# Altium PCB sigjumper.PcbDoc (part 1 of 5)
Units mil, origin at the board's own origin, x right, y up, seen from the top; angles counter-clockwise.
Board outline 7874.02 x 2559.06 mil, 14 copper layers (TOP, P1(GND), S1(V), P2(GND), S2(H), P3(GND), S3(V12/V2V5), S4(VDDR), P4(GND), S5(V), P5(GND), S6(H), P6(GND), BOT), stack 115.1 mil thick; 22 components, 186 nets, 824 pads, 732 vias.
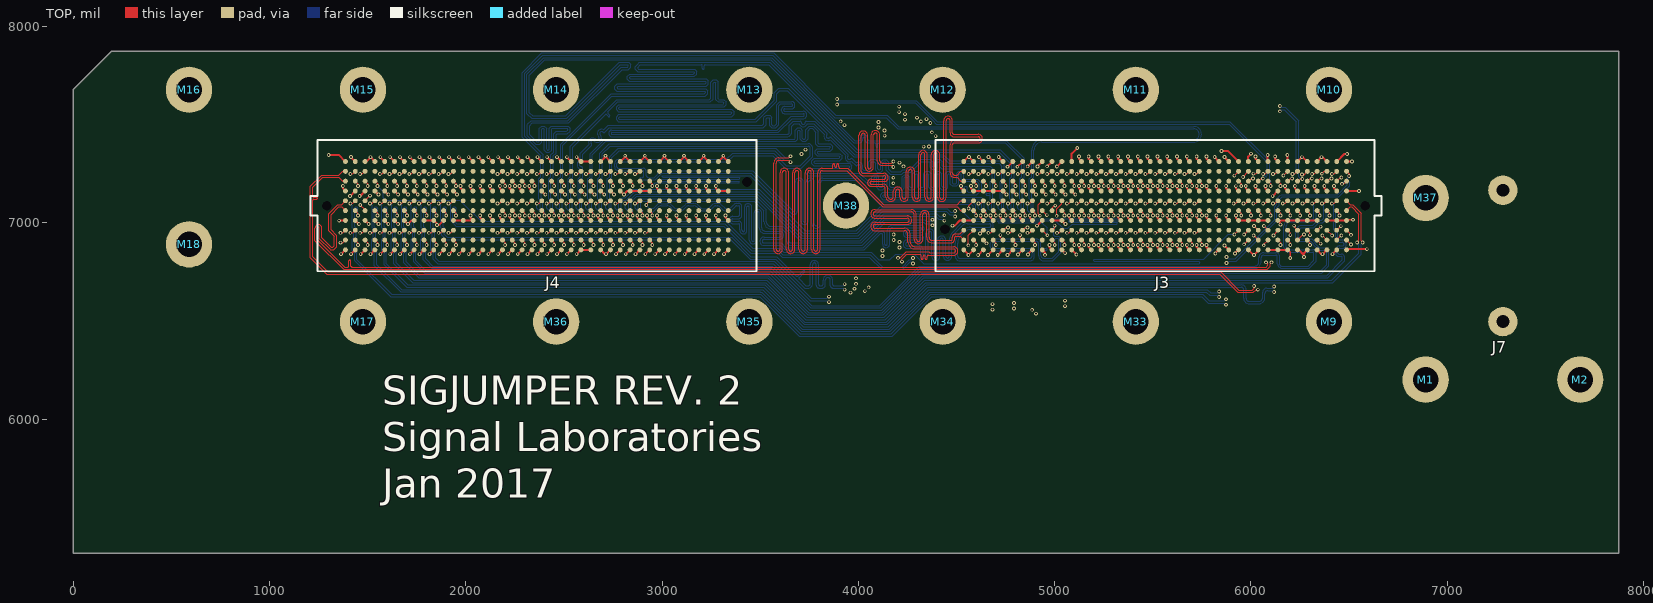
[diagram p0: TOP view]
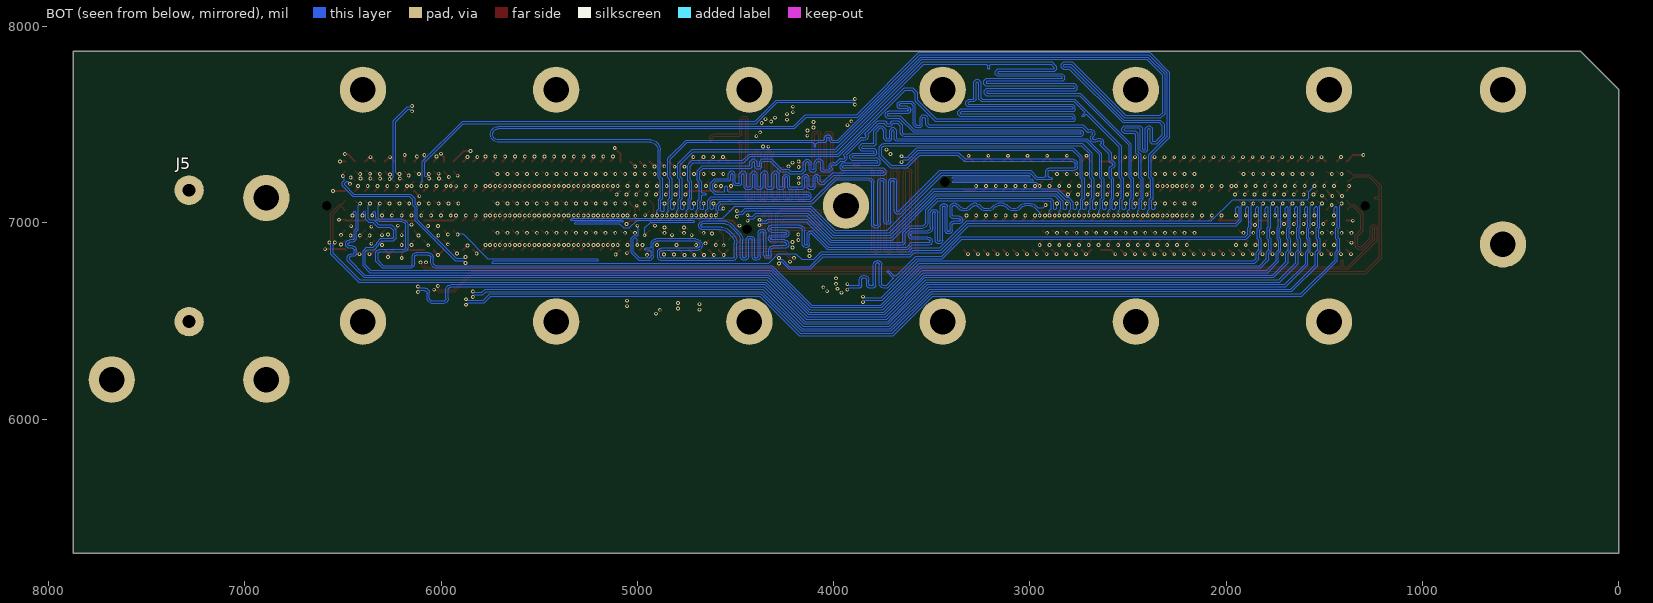
[diagram p1: BOT view, seen from below]
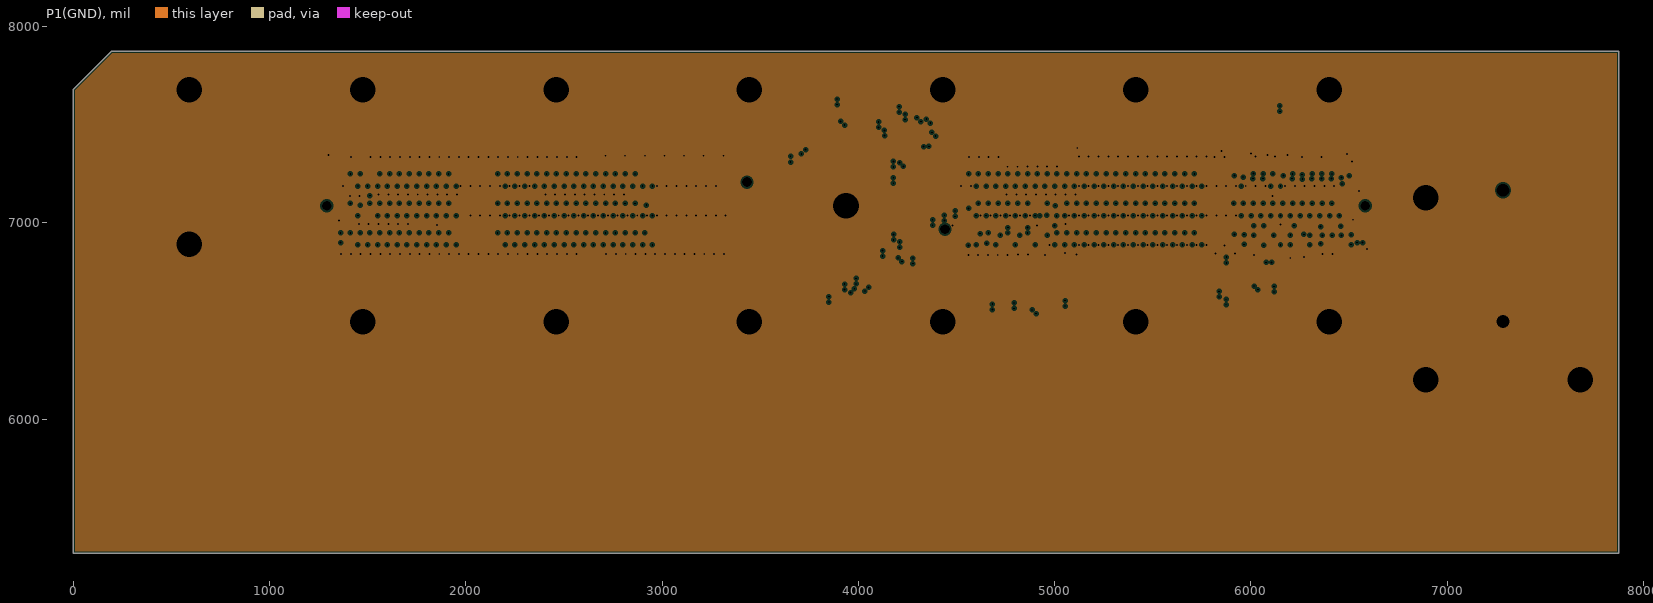
[diagram p2: P1(GND), clearances drawn from the general rule]
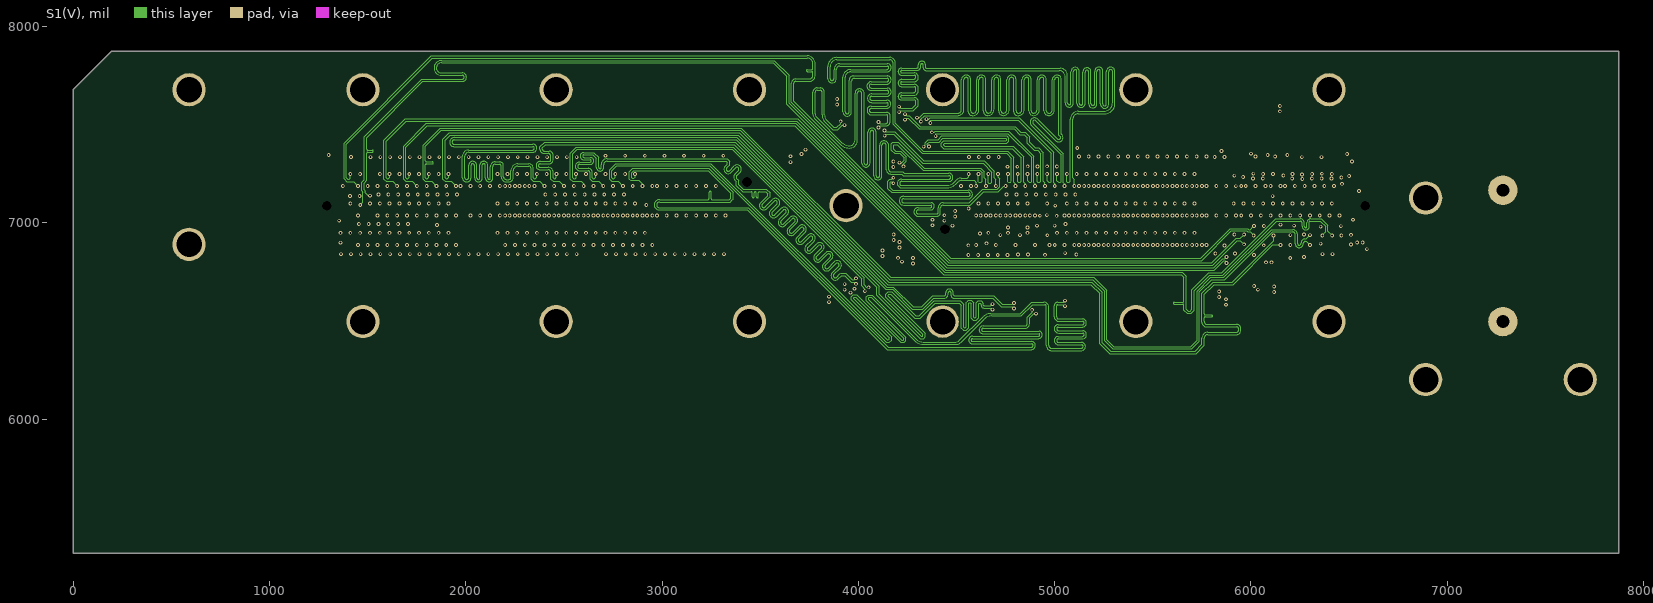
[diagram p3: S1(V)]
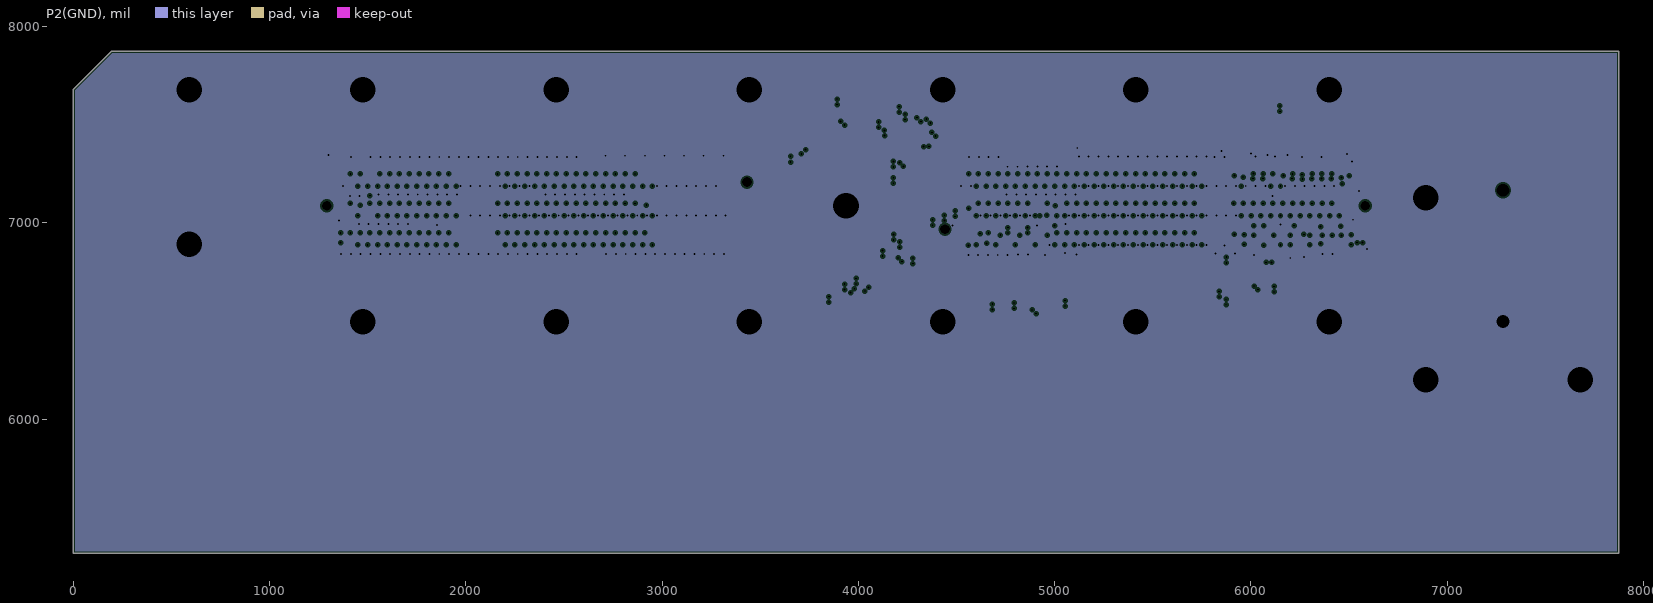
[diagram p4: P2(GND), clearances drawn from the general rule]
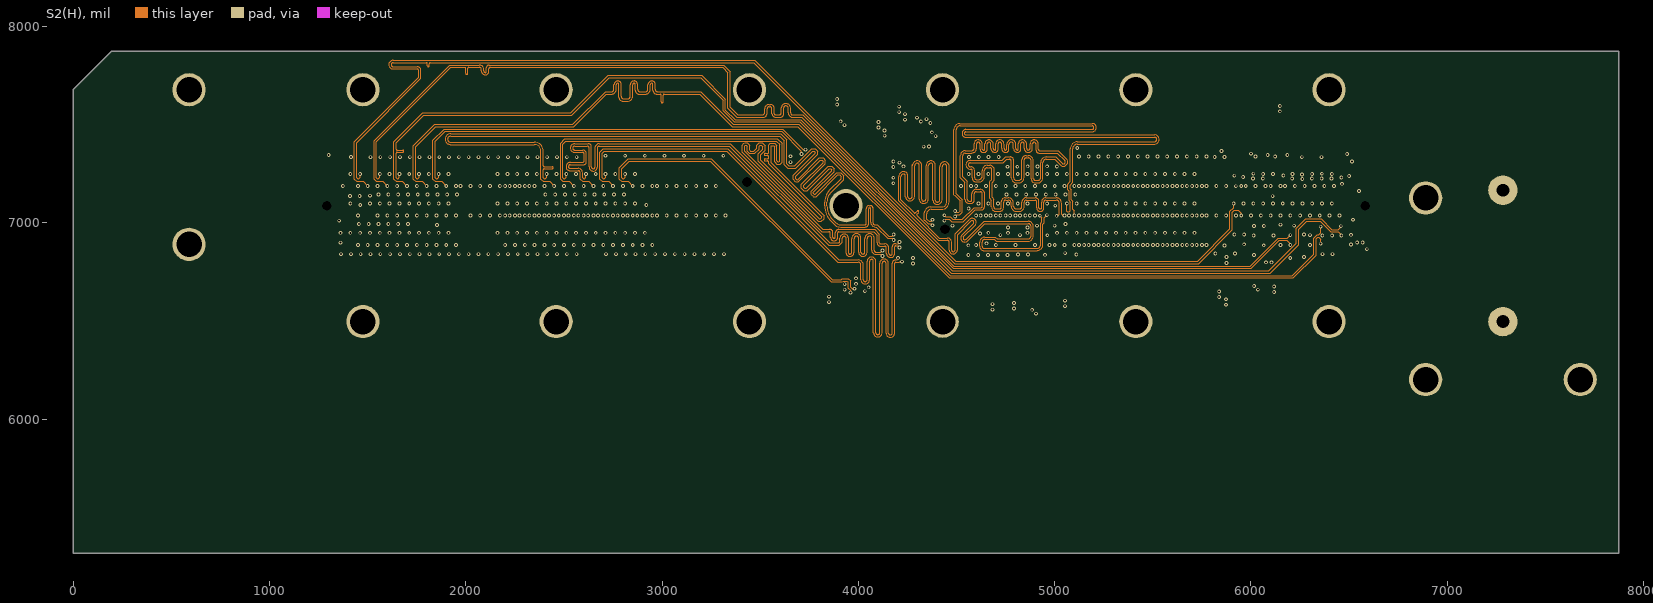
[diagram p5: S2(H)]
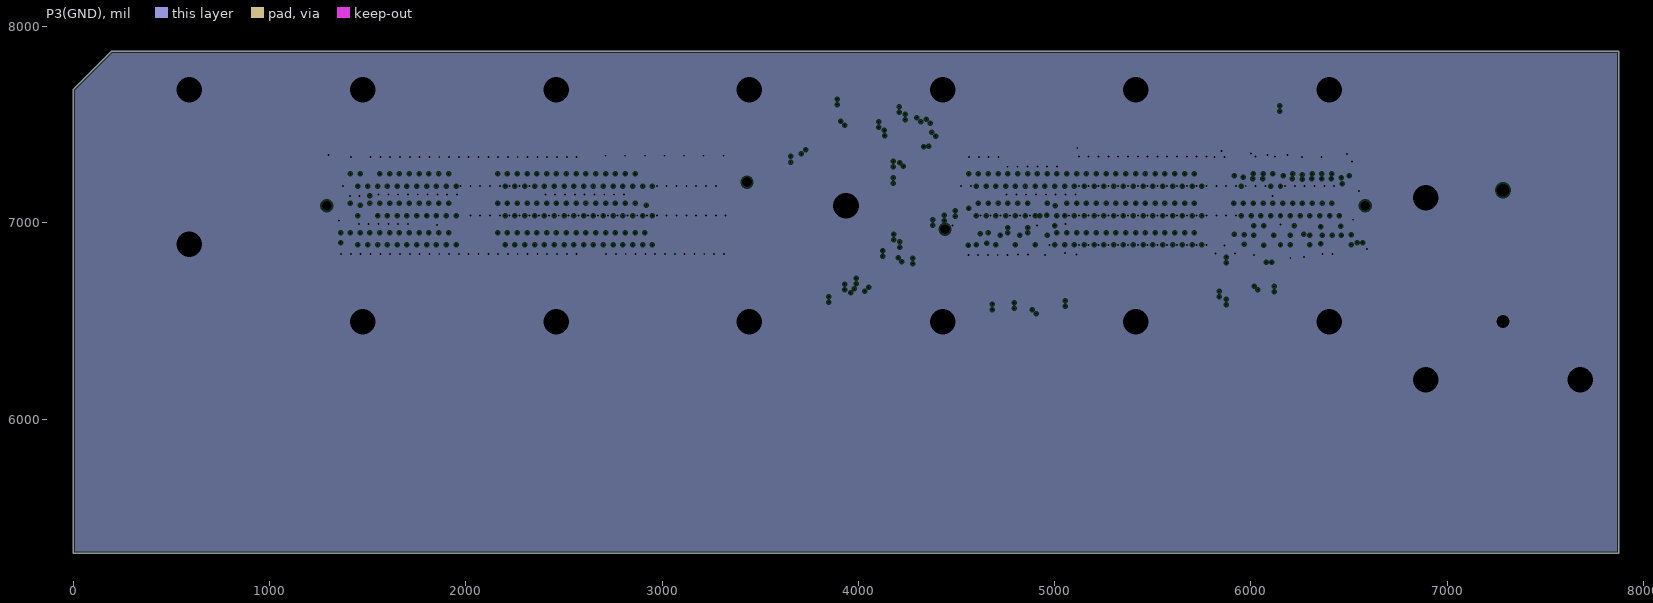
[diagram p6: P3(GND), clearances drawn from the general rule]
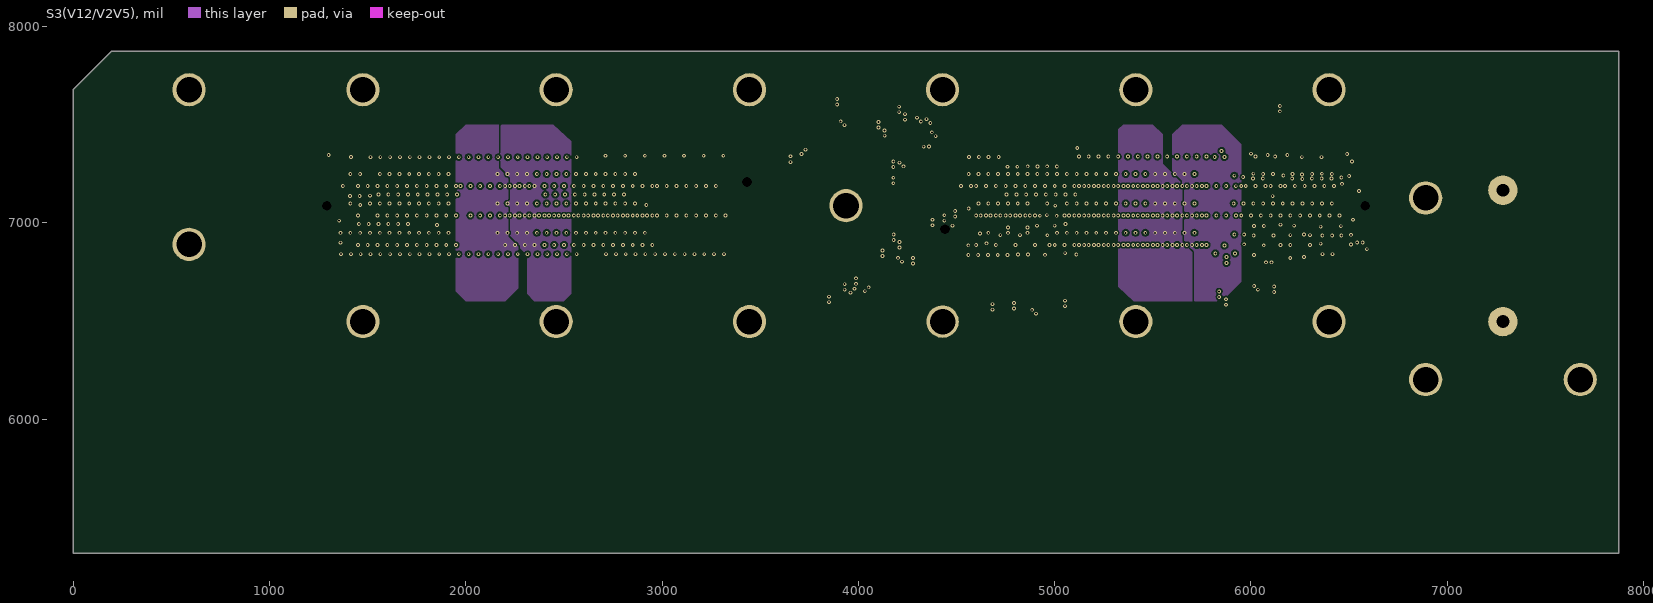
[diagram p7: S3(V12/V2V5)]
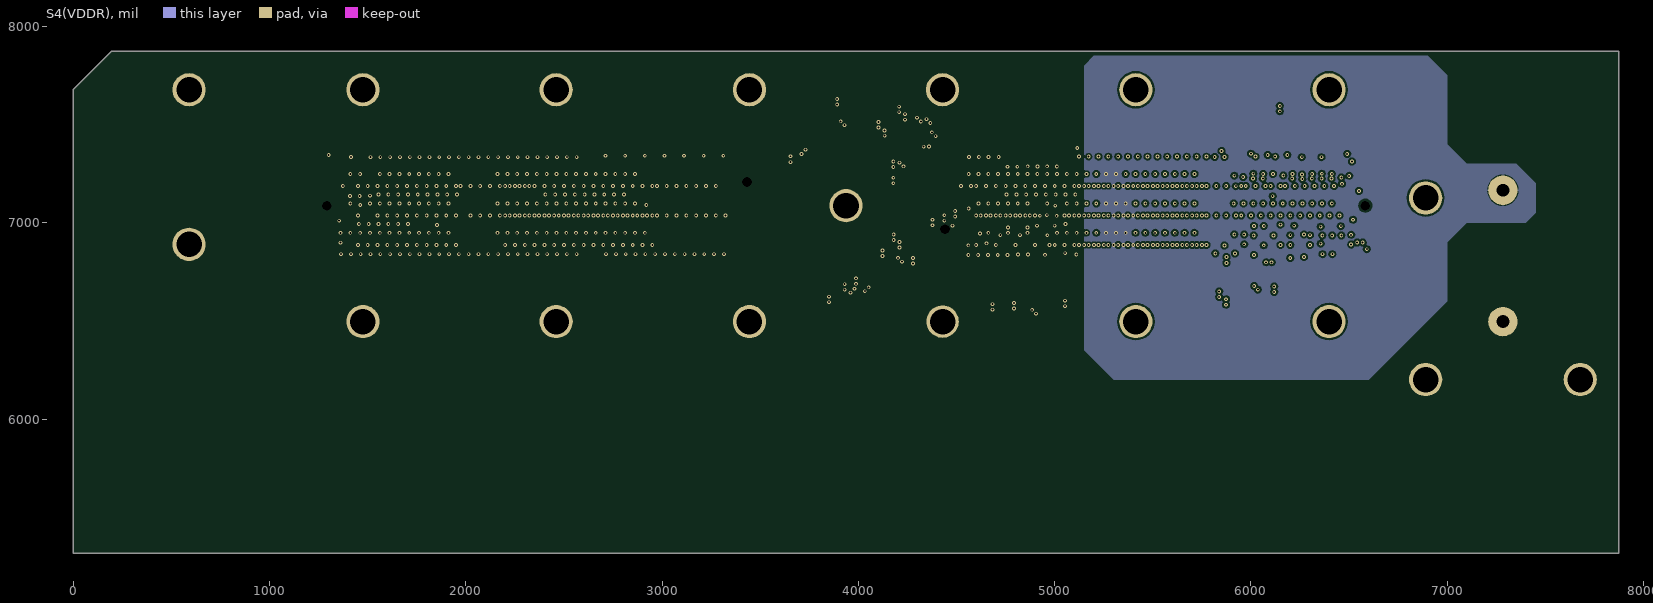
[diagram p8: S4(VDDR)]
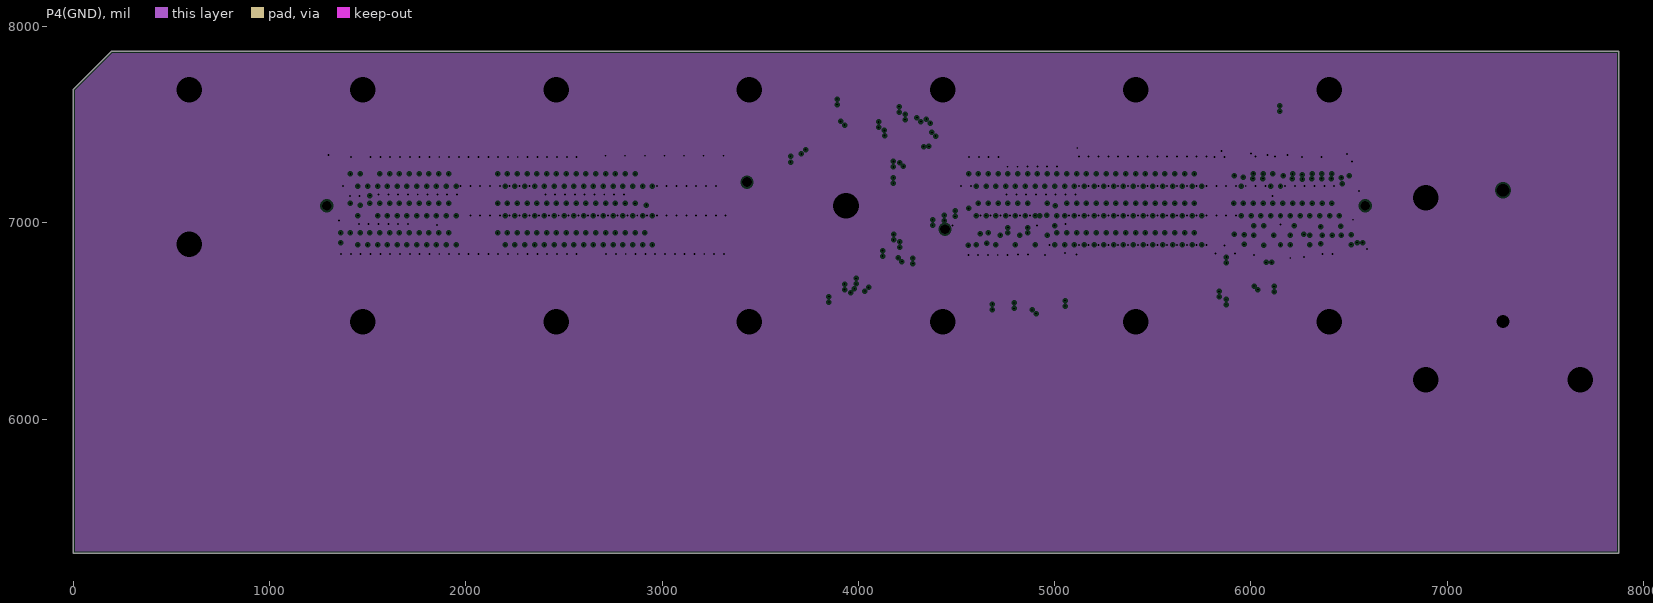
[diagram p9: P4(GND), clearances drawn from the general rule]
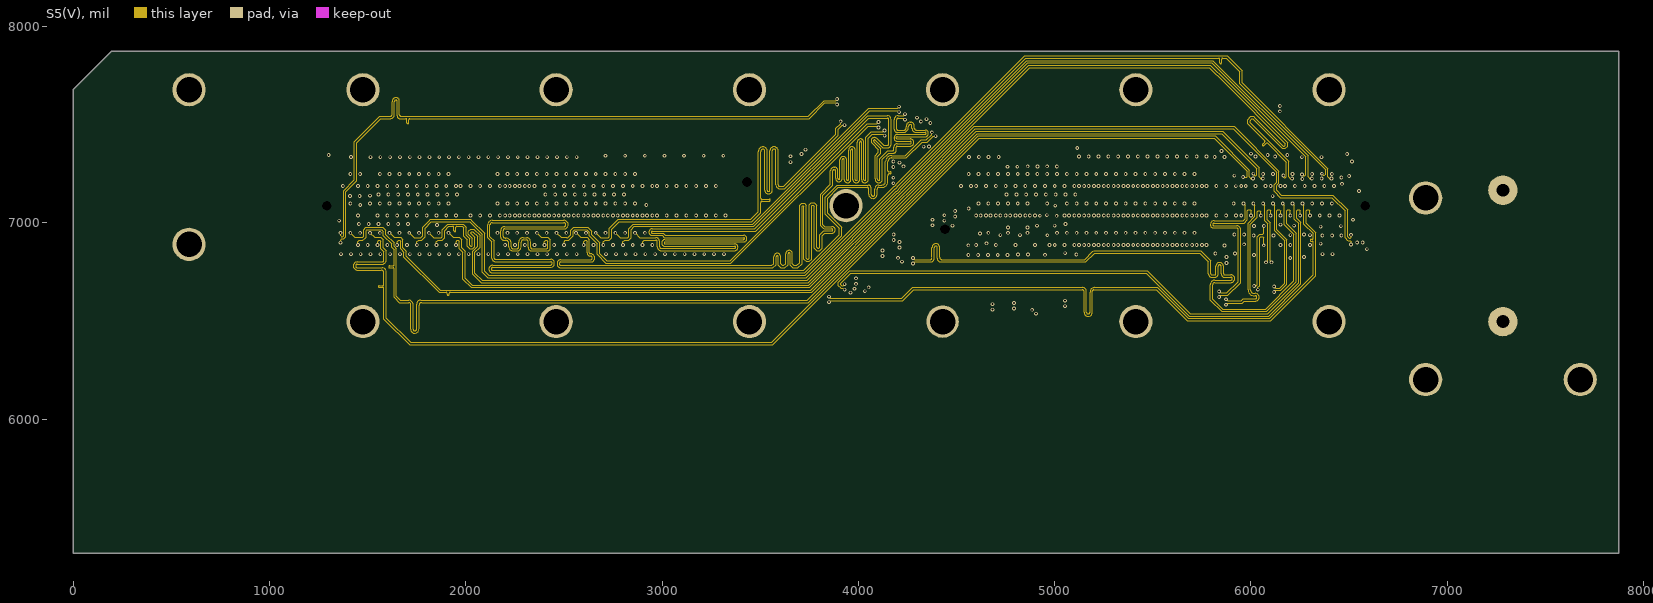
[diagram p10: S5(V)]
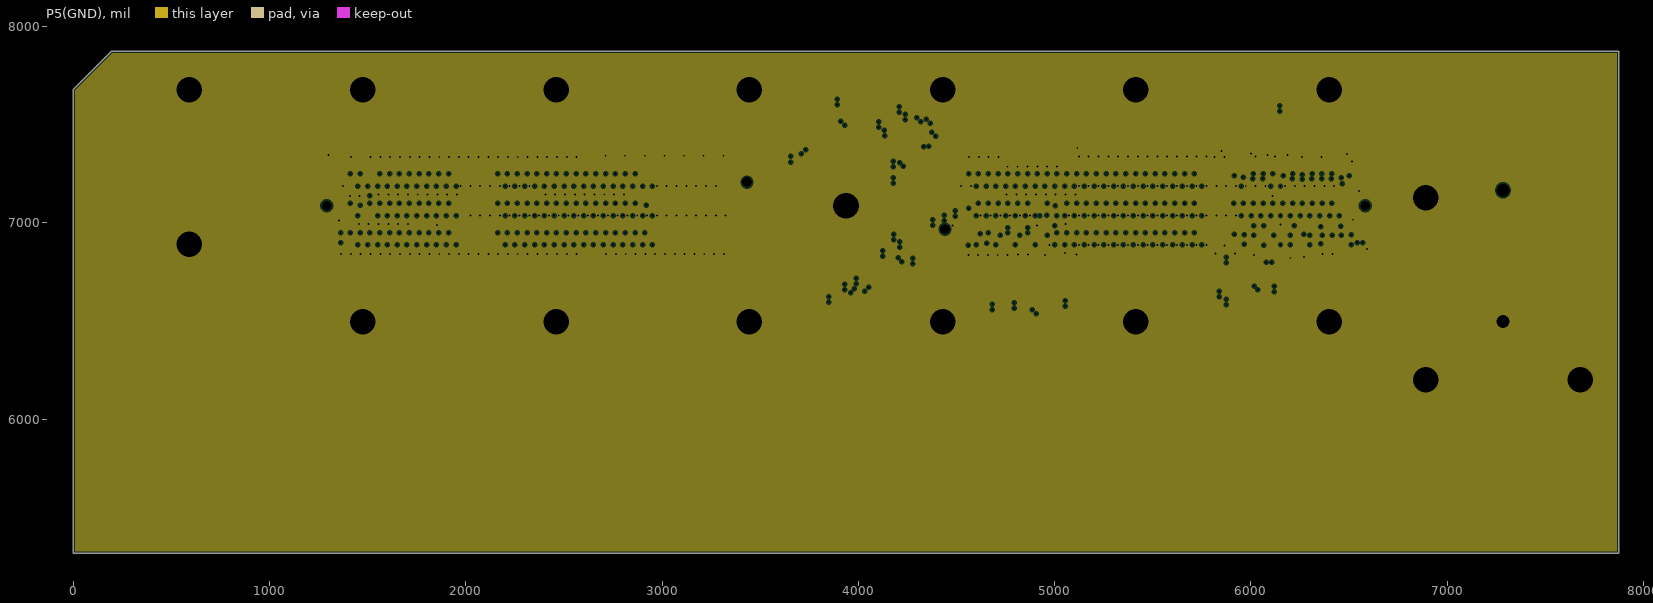
[diagram p11: P5(GND), clearances drawn from the general rule]
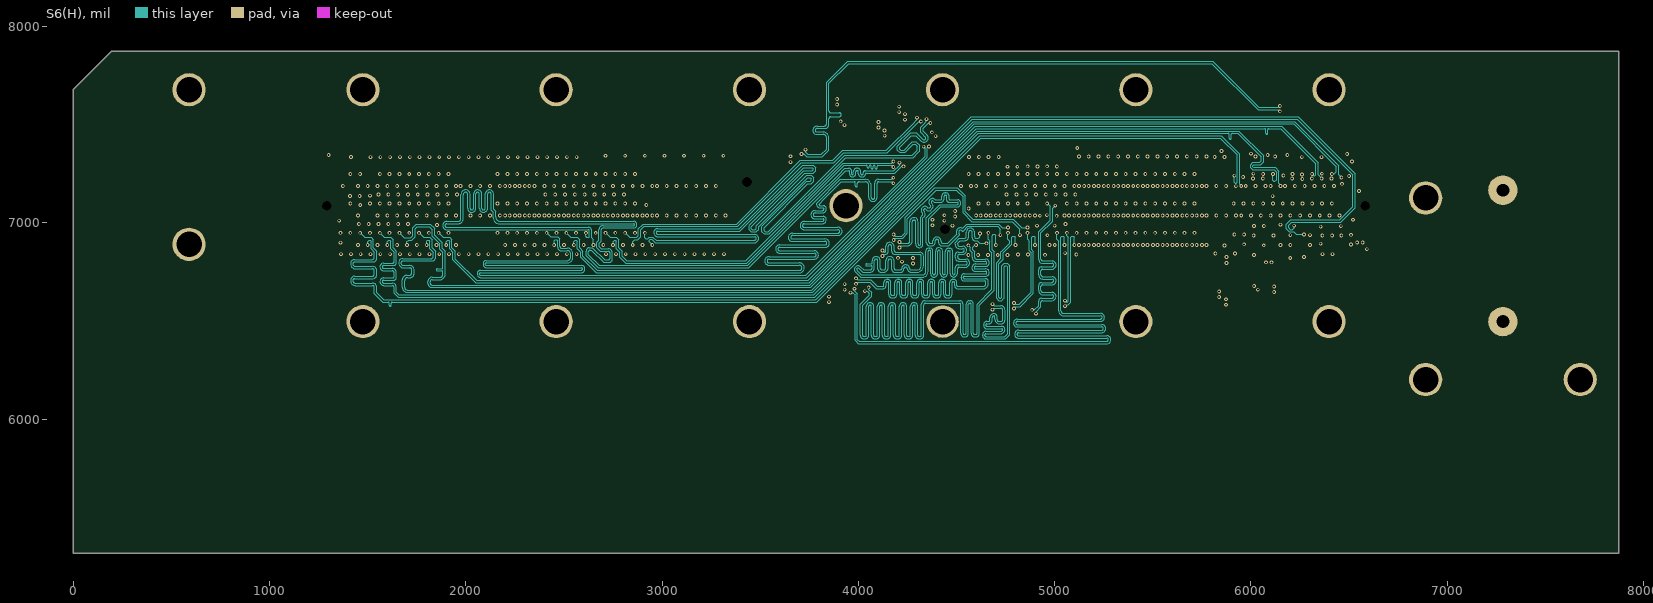
[diagram p12: S6(H)]
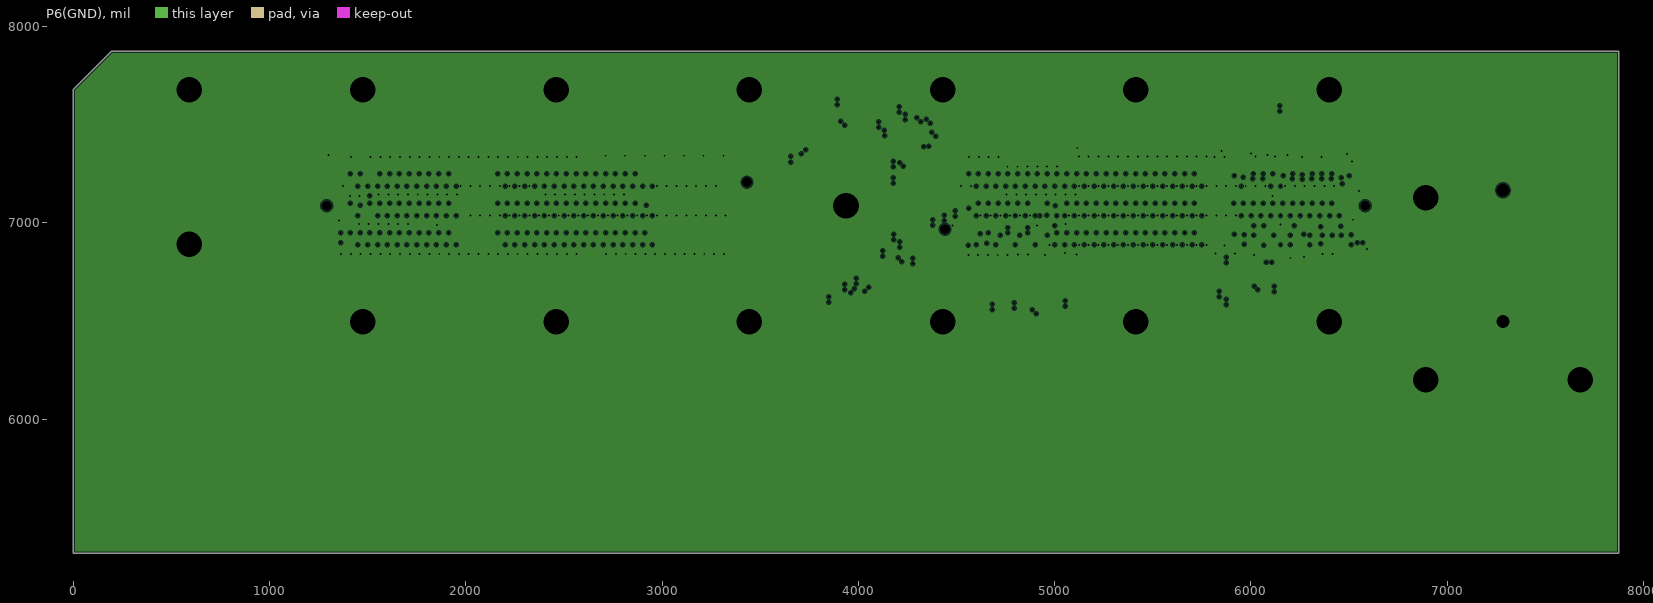
[diagram p13: P6(GND), clearances drawn from the general rule]

## Layer stack, top to bottom
Top Solder: solder mask 0.5, Solder Resist, Dk 3.3
TOP: signal copper 2.25
Dielectric1: prepreg 5, N4000-13EPSI (1080) PRE, Dk 4.2
P1(GND): plane copper 1.3, net GND
Dielectric 4: core 10, N4000-13EPSI, Dk 4.2
S1(V): signal copper 1.3
Dielectric 18: prepreg 5, N4000-13EPSI (2116) PRE, Dk 4.2
P2(GND): plane copper 1.3, net GND
Dielectric 11: core 10, N4000-13EPSI, Dk 4.2
S2(H): signal copper 1.3
Dielectric 5: prepreg 5, N4000-13EPSI (2116) PRE, Dk 4.2
P3(GND): plane copper 1.3, net GND
Dielectric 13: core 10, N4000-13EPSI, Dk 4.2
S3(V12/V2V5): signal copper 1.3
Dielectric 14: prepreg 5, N4000-13EPSI (1080) PRE, Dk 4.2
S4(VDDR): signal copper 1.3
Dielectric 15: core 10, N4000-13EPSI, Dk 4.2
P4(GND): plane copper 1.3, net GND
Dielectric 6: prepreg 5, N4000-13EPSI (2116) PRE, Dk 4.2
S5(V): signal copper 1.3
Dielectric 19: core 10, N4000-13EPSI, Dk 4.2
P5(GND): plane copper 1.3, net GND
Dielectric 7: prepreg 5, N4000-13EPSI (2116) PRE, Dk 4.2
S6(H): signal copper 1.3
Dielectric 16: core 10, N4000-13EPSI, Dk 4.2
P6(GND): plane copper 1.3, net GND
Dielectric 8: prepreg 5, N4000-13EPSI (1080) PRE, Dk 4.2
BOT: signal copper 2.25
Bottom Solder: solder mask 0.5, Solder Resist, Dk 3.3

## Board outline
0,5314.96 0,7677.17 196.85,7874.02 7874.02,7874.02 7874.02,5314.96

## Design rules (kind name [scope] priority, off if disabled: settings)
AssemblyTestPointUsage [All] p1 off:
AssemblyTestpoint [All] p1 off: testpointundercomponent=TRUE minsize=40 maxsize=100 preferedsize=60 minholesize=0 maxholesize=40 preferedholesize=32 testpointgrid=1 usegrid=TRUE gridtolerance=0.01 allowsidetop=TRUE allowsidebottom=TRUE
Clearance Clearance_tight_through_vias [IsTrack and InNetClass('tight') vs IsVia and not InNetClass('tight')] p1: gap=4.5
Clearance Clearance_z50_through_pads_a [InNetClass('z50') and IsTrack vs IsComponentPad and not InNetClass('tight')] p2: gap=6.65
Clearance Clearance_z50_through_pads_b [(InNetClass('z50') and IsTrack) and not InNetClass('tight') vs IsComponentPad] p3: gap=6.65
Clearance Clearance_z50_to_copper_a [InNetClass('z50') and IsTrack vs (IsTrack or IsFill or InPolygon) and not InNetClass('tight')] p4: gap=8
Clearance Clearance_z50_to_copper_b [(InNetClass('z50') and IsTrack) and not InNetClass('tight') vs (IsTrack or IsFill or InPolygon)] p5: gap=8
Clearance Clearance_z50_through_vias [InNetClass('z50') vs IsTrack] p6: gap=4.21
Clearance Clearance_through_vias [IsVia vs IsTrack] p7: gap=4.21
Clearance [All] p8: gap=3.5 except(10: Arc-Poly Track-Poly SMDPad-Poly THPad-Poly Via-Poly Fill-Poly Poly-Poly)
ComponentClearance [All] p1 off: gap=10 collisioncheckmode=3 verticalgap=10 showdistances=FALSE
DiffPairsRouting DiffPairsRouting_tight [InNetClass('tight')] p1: maxlimit=9 minlimit=4.5 mostfreqgap=9 toplayer_maxgap=4.5 toplayer_prefgap=4.5 toplayer_minwidth=3.5 toplayer_maxwidth=3.5 toplayer_prefwidth=3.5 midlayer1_mingap=9 midlayer1_minwidth=4 midlayer1_maxwidth=4 midlayer1_prefwidth=4 midlayer2_maxgap=4.5 midlayer2_prefgap=4.5 midlayer2_minwidth=3.5 midlayer2_maxwidth=3.5 midlayer2_prefwidth=3.5 midlayer3_maxgap=4.5 midlayer3_prefgap=4.5 midlayer3_minwidth=3.5 midlayer3_maxwidth=3.5 midlayer3_prefwidth=3.5 midlayer4_mingap=9 midlayer4_minwidth=4 midlayer4_maxwidth=4 midlayer4_prefwidth=4 midlayer5_maxgap=4.5 midlayer5_prefgap=4.5 midlayer5_minwidth=3.5 midlayer5_maxwidth=3.5 midlayer5_prefwidth=3.5 midlayer6_maxgap=4.5 midlayer6_prefgap=4.5 midlayer6_minwidth=3.5 midlayer6_maxwidth=3.5 midlayer6_prefwidth=3.5 bottomlayer_maxgap=4.5 bottomlayer_prefgap=4.5 bottomlayer_minwidth=3.5 bottomlayer_maxwidth=3.5 bottomlayer_prefwidth=3.5 maxuncoupledlength=250
DiffPairsRouting DiffPairsRouting_loose [InNetClass('loose')] p2: maxlimit=9 minlimit=8 mostfreqgap=9 toplayer_maxgap=8 toplayer_prefgap=8 toplayer_minwidth=4 toplayer_maxwidth=4 toplayer_prefwidth=4 midlayer1_mingap=9 midlayer1_minwidth=4 midlayer1_maxwidth=4 midlayer1_prefwidth=4 midlayer2_maxgap=8 midlayer2_prefgap=8 midlayer2_minwidth=4 midlayer2_maxwidth=4 midlayer2_prefwidth=4 midlayer3_maxgap=8 midlayer3_prefgap=8 midlayer3_minwidth=4 midlayer3_maxwidth=4 midlayer3_prefwidth=4 midlayer4_mingap=9 midlayer4_minwidth=4 midlayer4_maxwidth=4 midlayer4_prefwidth=4 midlayer5_maxgap=8 midlayer5_prefgap=8 midlayer5_minwidth=4 midlayer5_maxwidth=4 midlayer5_prefwidth=4 midlayer6_maxgap=8 midlayer6_prefgap=8 midlayer6_minwidth=4 midlayer6_maxwidth=4 midlayer6_prefwidth=4 bottomlayer_maxgap=8 bottomlayer_prefgap=8 bottomlayer_minwidth=4 bottomlayer_maxwidth=4 bottomlayer_prefwidth=4 maxuncoupledlength=250
FabricationTestPointUsage [All] p1 off: valid=0 allowmultiple=FALSE
FabricationTestpoint [All] p1 off: side=3 testpointundercomponent=TRUE minsize=40 maxsize=100 preferedsize=60 minholesize=0 maxholesize=40 preferedholesize=32 testpointgrid=1 allowsidetop=TRUE allowsidebottom=TRUE usegrid=TRUE gridtolerance=0.01
FanoutControl Fanout_BGA [IsBGA] p1 off: bgadir=Out bgaviamode=Centered fanoutstyle=Auto fanoutdirection=Alternating viagrid=1 // Fanout_BGA (Default Rule)
FanoutControl Fanout_LCC [IsLCC] p2 off: bgadir=Out bgaviamode=Centered fanoutstyle=Auto fanoutdirection=Alternating viagrid=1 // Fanout_LCC (Default Rule)
FanoutControl Fanout_SOIC [IsSOIC] p3 off: bgadir=Out bgaviamode=Centered fanoutstyle=Auto fanoutdirection=Alternating viagrid=1 // Fanout_SOIC (Default Rule)
FanoutControl Fanout_Small [(CompPinCount < 5)] p4 off: bgadir=Out bgaviamode=Centered fanoutstyle=Auto fanoutdirection=OutThenIn viagrid=1 // Fanout_Small (Default Rule)
FanoutControl Fanout_Default [All] p5 off: bgadir=Out bgaviamode=Centered fanoutstyle=Auto fanoutdirection=Alternating viagrid=1 // Fanout_Default (Default Rule)
Height [All] p1 off: minheight=0 maxheight=1000 prefheight=500
HoleSize [All] p1: absolutevalues=TRUE maxlimit=1000 minlimit=8 maxpercent=80.000 minpercent=20.000
LayerPairs [All] p1 off: enforce=TRUE
Length Z50 [All] p1: maxlimit=6000 minlimit=5500
Length "Loose Class" [InNetClass('loose')] p2: maxlimit=6000 minlimit=5500
MinimumSolderMaskSliver [All] p1: minsoldermaskwidth=3.94
NetAntennae [All] p1 off: netantennaetolerance=0
PlaneClearance [All] p1: clearance=9
PlaneConnect [All] p1: planeconnectstyle=Direct reliefexpansion=20 reliefentries=4 reliefconductorwidth=10 reliefairgap=10
PolygonConnect PolygonConnectNoThermal [All vs InPolygonClass('NO_THERMAL')] p1: connectstyle=Direct reliefconductorwidth=10 reliefentries=4 polygonreliefangle="90 Angle" airgapwidth=10
PolygonConnect PolygonConnectVia [IsVia] p2: connectstyle=Direct reliefconductorwidth=10 reliefentries=4 polygonreliefangle="90 Angle" airgapwidth=10
PolygonConnect [All] p3: connectstyle=Relief reliefconductorwidth=7.87 reliefentries=4 polygonreliefangle="90 Angle" airgapwidth=3.94
RoutingVias [All] p1: holewidth=10 width=19 viastyle="Through Hole" minholewidth=10 minwidth=19 maxholewidth=28 maxwidth=50
SilkToBoardRegionClearance [All] p1 off:
SilkToSolderMaskClearance SilkscreenOverComponentPads [IsPad] p1: minsilkscreentomaskgap=10 clearancetoexposedcopper=TRUE
SolderMaskExpansion [All] p1: expansion=1.97
Width Width_z50 [InNetClass('z50')] p1: maxlimit=4 minlimit=4 preferedwidth=4
Width [All] p2: maxlimit=200 minlimit=3.75 preferedwidth=3.75
10 further rules are at their usual default settings.

## Classes and differential pairs
net class IL1.SDR: IL1.SDR.G8.D0_N IL1.SDR.G8.D0_P IL1.SDR.G8.D1_N IL1.SDR.G8.D1_P IL1.SDR.G8.D2_N IL1.SDR.G8.D2_P IL1.SDR.G8.D3_N IL1.SDR.G8.D3_P IL1.SDR.G13.C_N IL1.SDR.G13.C_P IL1.SDR.G13.D0_N IL1.SDR.G13.D0_P IL1.SDR.G13.D1_N IL1.SDR.G13.D1_P IL1.SDR.G13.D2_N IL1.SDR.G13.D2_P IL1.SDR.G13.D3_N IL1.SDR.G13.D3_P IL1.SDR.G13.D4_N IL1.SDR.G13.D4_P IL1.SDR.G13.D5_N IL1.SDR.G13.D5_P IL1.SDR.G13.D6
net class IL0.SDR: IL0.SDR.G8.D0_N IL0.SDR.G8.D0_P IL0.SDR.G8.D1_N IL0.SDR.G8.D1_P IL0.SDR.G8.D2_N IL0.SDR.G8.D2_P IL0.SDR.G8.D3_N IL0.SDR.G8.D3_P IL0.SDR.G13.C_N IL0.SDR.G13.C_P IL0.SDR.G13.D0_N IL0.SDR.G13.D0_P IL0.SDR.G13.D1_N IL0.SDR.G13.D1_P IL0.SDR.G13.D2_N IL0.SDR.G13.D2_P IL0.SDR.G13.D3_N IL0.SDR.G13.D3_P IL0.SDR.G13.D4_N IL0.SDR.G13.D4_P IL0.SDR.G13.D5_N IL0.SDR.G13.D5_P IL0.SDR.G13.D6
net class IL1.DDR: IL1.DDR.G0.D0_N IL1.DDR.G0.D0_P IL1.DDR.G0.D1_N IL1.DDR.G0.D1_P IL1.DDR.G0.D2_N IL1.DDR.G0.D2_P IL1.DDR.G0.D3_N IL1.DDR.G0.D3_P IL1.DDR.G0.D4_N IL1.DDR.G0.D4_P IL1.DDR.G0.S_N IL1.DDR.G0.S_P IL1.DDR.G1.D0_N IL1.DDR.G1.D0_P IL1.DDR.G1.D1_N IL1.DDR.G1.D1_P IL1.DDR.G1.D2_N IL1.DDR.G1.D2_P IL1.DDR.G1.D3_N IL1.DDR.G1.D3_P IL1.DDR.G1.D4_N IL1.DDR.G1.D4_P IL1.DDR.G1.S_N IL1.DDR.G1.S_P IL1.DDR.G2.D0_N IL1.DDR.G2.D0_P IL1.DDR.G2.D1_N IL1.DDR.G2.D1_P IL1.DDR.G2.D2_N IL1.DDR.G2.D2_P IL1.DDR.G2.D3_N IL1.DDR.G2.D3_P IL1.DDR.G2.D4_N IL1.DDR.G2.D4_P IL1.DDR.G2.S_N IL1.DDR.G2.S_P IL1.DDR.G3.D0_N IL1.DDR.G3.D0_P IL1.DDR.G3.D1_N IL1.DDR.G3.D1_P IL1.DDR.G3.D2_N IL1.DDR.G3.D2_P IL1.DDR.G3.D3_N IL1.DDR.G3.D3_P IL1.DDR.G3.D4_N IL1.DDR.G3.D4_P IL1.DDR.G3.S_N IL1.DDR.G3.S_P
net class IL0.DDR: IL0.DDR.G0.D0_N IL0.DDR.G0.D0_P IL0.DDR.G0.D1_N IL0.DDR.G0.D1_P IL0.DDR.G0.D2_N IL0.DDR.G0.D2_P IL0.DDR.G0.D3_N IL0.DDR.G0.D3_P IL0.DDR.G0.D4_N IL0.DDR.G0.D4_P IL0.DDR.G0.S_N IL0.DDR.G0.S_P IL0.DDR.G1.D0_N IL0.DDR.G1.D0_P IL0.DDR.G1.D1_N IL0.DDR.G1.D1_P IL0.DDR.G1.D2_N IL0.DDR.G1.D2_P IL0.DDR.G1.D3_N IL0.DDR.G1.D3_P IL0.DDR.G1.D4_N IL0.DDR.G1.D4_P IL0.DDR.G1.S_N IL0.DDR.G1.S_P IL0.DDR.G2.D0_N IL0.DDR.G2.D0_P IL0.DDR.G2.D1_N IL0.DDR.G2.D1_P IL0.DDR.G2.D2_N IL0.DDR.G2.D2_P IL0.DDR.G2.D3_N IL0.DDR.G2.D3_P IL0.DDR.G2.D4_N IL0.DDR.G2.D4_P IL0.DDR.G2.S_N IL0.DDR.G2.S_P IL0.DDR.G3.D0_N IL0.DDR.G3.D0_P IL0.DDR.G3.D1_N IL0.DDR.G3.D1_P IL0.DDR.G3.D2_N IL0.DDR.G3.D2_P IL0.DDR.G3.D3_N IL0.DDR.G3.D3_P IL0.DDR.G3.D4_N IL0.DDR.G3.D4_P IL0.DDR.G3.S_N IL0.DDR.G3.S_P
component class CON-R-T: J3
component class CON-L-T: J4
net class z50: IL0.DDR.G0.D0_N IL0.DDR.G0.D0_P IL0.DDR.G0.D1_N IL0.DDR.G0.D1_P IL0.DDR.G0.D2_N IL0.DDR.G0.D2_P IL0.DDR.G0.D3_N IL0.DDR.G0.D3_P IL0.DDR.G0.D4_N IL0.DDR.G0.D4_P IL0.DDR.G0.S_N IL0.DDR.G0.S_P IL0.DDR.G1.D0_N IL0.DDR.G1.D0_P IL0.DDR.G1.D1_N IL0.DDR.G1.D1_P IL0.DDR.G1.D2_N IL0.DDR.G1.D2_P IL0.DDR.G1.D3_N IL0.DDR.G1.D3_P IL0.DDR.G1.D4_N IL0.DDR.G1.D4_P IL0.DDR.G1.S_N IL0.DDR.G1.S_P IL0.DDR.G2.D0_N IL0.DDR.G2.D0_P IL0.DDR.G2.D1_N IL0.DDR.G2.D1_P IL0.DDR.G2.D2_N IL0.DDR.G2.D2_P IL0.DDR.G2.D3_N IL0.DDR.G2.D3_P IL0.DDR.G2.D4_N IL0.DDR.G2.D4_P IL0.DDR.G2.S_N IL0.DDR.G2.S_P IL0.DDR.G3.D0_N IL0.DDR.G3.D0_P IL0.DDR.G3.D1_N IL0.DDR.G3.D1_P IL0.DDR.G3.D2_N IL0.DDR.G3.D2_P IL0.DDR.G3.D3_N IL0.DDR.G3.D3_P IL0.DDR.G3.D4_N IL0.DDR.G3.D4_P IL0.DDR.G3.S_N IL0.DDR.G3.S_P IL0.SDR.G8.D0_N IL0.SDR.G8.D0_P IL0.SDR.G8.D1_N IL0.SDR.G8.D1_P IL0.SDR.G8.D2_N IL0.SDR.G8.D2_P IL0.SDR.G8.D3_N IL0.SDR.G8.D3_P IL0.SDR.G13.C_N IL0.SDR.G13.C_P IL0.SDR.G13.D0_N IL0.SDR.G13.D0_P IL0.SDR.G13.D1_N IL0.SDR.G13.D1_P IL0.SDR.G13.D2_N IL0.SDR.G13.D2_P IL0.SDR.G13.D3_N IL0.SDR.G13.D3_P IL0.SDR.G13.D4_N IL0.SDR.G13.D4_P IL0.SDR.G13.D5_N IL0.SDR.G13.D5_P IL0.SDR.G13.D6 IL1.DDR.G0.D0_N IL1.DDR.G0.D0_P IL1.DDR.G0.D1_N IL1.DDR.G0.D1_P IL1.DDR.G0.D2_N IL1.DDR.G0.D2_P IL1.DDR.G0.D3_N IL1.DDR.G0.D3_P IL1.DDR.G0.D4_N IL1.DDR.G0.D4_P IL1.DDR.G0.S_N IL1.DDR.G0.S_P IL1.DDR.G1.D0_N IL1.DDR.G1.D0_P IL1.DDR.G1.D1_N IL1.DDR.G1.D1_P IL1.DDR.G1.D2_N IL1.DDR.G1.D2_P IL1.DDR.G1.D3_N IL1.DDR.G1.D3_P IL1.DDR.G1.D4_N IL1.DDR.G1.D4_P IL1.DDR.G1.S_N IL1.DDR.G1.S_P IL1.DDR.G2.D0_N IL1.DDR.G2.D0_P IL1.DDR.G2.D1_N IL1.DDR.G2.D1_P IL1.DDR.G2.D2_N IL1.DDR.G2.D2_P IL1.DDR.G2.D3_N IL1.DDR.G2.D3_P IL1.DDR.G2.D4_N IL1.DDR.G2.D4_P IL1.DDR.G2.S_N IL1.DDR.G2.S_P IL1.DDR.G3.D0_N IL1.DDR.G3.D0_P IL1.DDR.G3.D1_N IL1.DDR.G3.D1_P IL1.DDR.G3.D2_N IL1.DDR.G3.D2_P IL1.DDR.G3.D3_N IL1.DDR.G3.D3_P IL1.DDR.G3.D4_N IL1.DDR.G3.D4_P IL1.DDR.G3.S_N IL1.DDR.G3.S_P IL1.SDR.G8.D0_N IL1.SDR.G8.D0_P IL1.SDR.G8.D1_N IL1.SDR.G8.D1_P IL1.SDR.G8.D2_N IL1.SDR.G8.D2_P IL1.SDR.G8.D3_N IL1.SDR.G8.D3_P IL1.SDR.G13.C_N IL1.SDR.G13.C_P IL1.SDR.G13.D0_N IL1.SDR.G13.D0_P IL1.SDR.G13.D1_N IL1.SDR.G13.D1_P IL1.SDR.G13.D2_N IL1.SDR.G13.D2_P IL1.SDR.G13.D3_N IL1.SDR.G13.D3_P IL1.SDR.G13.D4_N IL1.SDR.G13.D4_P IL1.SDR.G13.D5_N IL1.SDR.G13.D5_P IL1.SDR.G13.D6 MCLK.C_N MCLK.C_P
net class tight: MCLK.C_N MCLK.C_P
net class loose: IL0.DDR.G0.D0_N IL0.DDR.G0.D0_P IL0.DDR.G0.D1_N IL0.DDR.G0.D1_P IL0.DDR.G0.D2_N IL0.DDR.G0.D2_P IL0.DDR.G0.D3_N IL0.DDR.G0.D3_P IL0.DDR.G0.D4_N IL0.DDR.G0.D4_P IL0.DDR.G0.S_N IL0.DDR.G0.S_P IL0.DDR.G1.D0_N IL0.DDR.G1.D0_P IL0.DDR.G1.D1_N IL0.DDR.G1.D1_P IL0.DDR.G1.D2_N IL0.DDR.G1.D2_P IL0.DDR.G1.D3_N IL0.DDR.G1.D3_P IL0.DDR.G1.D4_N IL0.DDR.G1.D4_P IL0.DDR.G1.S_N IL0.DDR.G1.S_P IL0.DDR.G2.D0_N IL0.DDR.G2.D0_P IL0.DDR.G2.D1_N IL0.DDR.G2.D1_P IL0.DDR.G2.D2_N IL0.DDR.G2.D2_P IL0.DDR.G2.D3_N IL0.DDR.G2.D3_P IL0.DDR.G2.D4_N IL0.DDR.G2.D4_P IL0.DDR.G2.S_N IL0.DDR.G2.S_P IL0.DDR.G3.D0_N IL0.DDR.G3.D0_P IL0.DDR.G3.D1_N IL0.DDR.G3.D1_P IL0.DDR.G3.D2_N IL0.DDR.G3.D2_P IL0.DDR.G3.D3_N IL0.DDR.G3.D3_P IL0.DDR.G3.D4_N IL0.DDR.G3.D4_P IL0.DDR.G3.S_N IL0.DDR.G3.S_P IL0.SDR.G8.D0_N IL0.SDR.G8.D0_P IL0.SDR.G8.D1_N IL0.SDR.G8.D1_P IL0.SDR.G8.D2_N IL0.SDR.G8.D2_P IL0.SDR.G8.D3_N IL0.SDR.G8.D3_P IL0.SDR.G13.C_N IL0.SDR.G13.C_P IL0.SDR.G13.D0_N IL0.SDR.G13.D0_P IL0.SDR.G13.D1_N IL0.SDR.G13.D1_P IL0.SDR.G13.D2_N IL0.SDR.G13.D2_P IL0.SDR.G13.D3_N IL0.SDR.G13.D3_P IL0.SDR.G13.D4_N IL0.SDR.G13.D4_P IL0.SDR.G13.D5_N IL0.SDR.G13.D5_P IL1.DDR.G0.D0_N IL1.DDR.G0.D0_P IL1.DDR.G0.D1_N IL1.DDR.G0.D1_P IL1.DDR.G0.D2_N IL1.DDR.G0.D2_P IL1.DDR.G0.D3_N IL1.DDR.G0.D3_P IL1.DDR.G0.D4_N IL1.DDR.G0.D4_P IL1.DDR.G0.S_N IL1.DDR.G0.S_P IL1.DDR.G1.D0_N IL1.DDR.G1.D0_P IL1.DDR.G1.D1_N IL1.DDR.G1.D1_P IL1.DDR.G1.D2_N IL1.DDR.G1.D2_P IL1.DDR.G1.D3_N IL1.DDR.G1.D3_P IL1.DDR.G1.D4_N IL1.DDR.G1.D4_P IL1.DDR.G1.S_N IL1.DDR.G1.S_P IL1.DDR.G2.D0_N IL1.DDR.G2.D0_P IL1.DDR.G2.D1_N IL1.DDR.G2.D1_P IL1.DDR.G2.D2_N IL1.DDR.G2.D2_P IL1.DDR.G2.D3_N IL1.DDR.G2.D3_P IL1.DDR.G2.D4_N IL1.DDR.G2.D4_P IL1.DDR.G2.S_N IL1.DDR.G2.S_P IL1.DDR.G3.D0_N IL1.DDR.G3.D0_P IL1.DDR.G3.D1_N IL1.DDR.G3.D1_P IL1.DDR.G3.D2_N IL1.DDR.G3.D2_P IL1.DDR.G3.D3_N IL1.DDR.G3.D3_P IL1.DDR.G3.D4_N IL1.DDR.G3.D4_P IL1.DDR.G3.S_N IL1.DDR.G3.S_P IL1.SDR.G8.D0_N IL1.SDR.G8.D0_P IL1.SDR.G8.D1_N IL1.SDR.G8.D1_P IL1.SDR.G8.D2_N IL1.SDR.G8.D2_P IL1.SDR.G8.D3_N IL1.SDR.G8.D3_P IL1.SDR.G13.C_N IL1.SDR.G13.C_P IL1.SDR.G13.D0_N IL1.SDR.G13.D0_P IL1.SDR.G13.D1_N IL1.SDR.G13.D1_P IL1.SDR.G13.D2_N IL1.SDR.G13.D2_P IL1.SDR.G13.D3_N IL1.SDR.G13.D3_P IL1.SDR.G13.D4_N IL1.SDR.G13.D4_P IL1.SDR.G13.D5_N IL1.SDR.G13.D5_P
differential pair IL1.SDR.G13.D5: +IL1.SDR.G13.D5_P -IL1.SDR.G13.D5_N
differential pair IL1.SDR.G13.D4: +IL1.SDR.G13.D4_P -IL1.SDR.G13.D4_N
differential pair IL1.SDR.G13.D3: +IL1.SDR.G13.D3_P -IL1.SDR.G13.D3_N
differential pair IL1.SDR.G13.D2: +IL1.SDR.G13.D2_P -IL1.SDR.G13.D2_N
differential pair IL1.SDR.G13.D1: +IL1.SDR.G13.D1_P -IL1.SDR.G13.D1_N
differential pair IL1.SDR.G13.D0: +IL1.SDR.G13.D0_P -IL1.SDR.G13.D0_N
differential pair IL1.SDR.G13.C: +IL1.SDR.G13.C_P -IL1.SDR.G13.C_N
differential pair IL1.SDR.G8.D3: +IL1.SDR.G8.D3_P -IL1.SDR.G8.D3_N
differential pair IL1.SDR.G8.D2: +IL1.SDR.G8.D2_P -IL1.SDR.G8.D2_N
differential pair IL1.SDR.G8.D1: +IL1.SDR.G8.D1_P -IL1.SDR.G8.D1_N
differential pair IL1.SDR.G8.D0: +IL1.SDR.G8.D0_P -IL1.SDR.G8.D0_N
differential pair IL1.DDR.G3.S: +IL1.DDR.G3.S_P -IL1.DDR.G3.S_N
differential pair IL1.DDR.G3.D4: +IL1.DDR.G3.D4_P -IL1.DDR.G3.D4_N
differential pair IL1.DDR.G3.D3: +IL1.DDR.G3.D3_P -IL1.DDR.G3.D3_N
differential pair IL1.DDR.G3.D2: +IL1.DDR.G3.D2_P -IL1.DDR.G3.D2_N
differential pair IL1.DDR.G3.D1: +IL1.DDR.G3.D1_P -IL1.DDR.G3.D1_N
differential pair IL1.DDR.G3.D0: +IL1.DDR.G3.D0_P -IL1.DDR.G3.D0_N
differential pair IL1.DDR.G2.S: +IL1.DDR.G2.S_P -IL1.DDR.G2.S_N
differential pair IL1.DDR.G2.D4: +IL1.DDR.G2.D4_P -IL1.DDR.G2.D4_N
differential pair IL1.DDR.G2.D3: +IL1.DDR.G2.D3_P -IL1.DDR.G2.D3_N
differential pair IL1.DDR.G2.D2: +IL1.DDR.G2.D2_P -IL1.DDR.G2.D2_N
differential pair IL1.DDR.G2.D1: +IL1.DDR.G2.D1_P -IL1.DDR.G2.D1_N
differential pair IL1.DDR.G2.D0: +IL1.DDR.G2.D0_P -IL1.DDR.G2.D0_N
differential pair IL1.DDR.G1.S: +IL1.DDR.G1.S_P -IL1.DDR.G1.S_N
differential pair IL1.DDR.G1.D4: +IL1.DDR.G1.D4_P -IL1.DDR.G1.D4_N
differential pair IL1.DDR.G1.D3: +IL1.DDR.G1.D3_P -IL1.DDR.G1.D3_N
differential pair IL1.DDR.G1.D2: +IL1.DDR.G1.D2_P -IL1.DDR.G1.D2_N
differential pair IL1.DDR.G1.D1: +IL1.DDR.G1.D1_P -IL1.DDR.G1.D1_N
differential pair IL1.DDR.G1.D0: +IL1.DDR.G1.D0_P -IL1.DDR.G1.D0_N
differential pair IL1.DDR.G0.S: +IL1.DDR.G0.S_P -IL1.DDR.G0.S_N
differential pair IL1.DDR.G0.D4: +IL1.DDR.G0.D4_P -IL1.DDR.G0.D4_N
differential pair IL1.DDR.G0.D3: +IL1.DDR.G0.D3_P -IL1.DDR.G0.D3_N
differential pair IL1.DDR.G0.D2: +IL1.DDR.G0.D2_P -IL1.DDR.G0.D2_N
differential pair IL1.DDR.G0.D1: +IL1.DDR.G0.D1_P -IL1.DDR.G0.D1_N
differential pair IL1.DDR.G0.D0: +IL1.DDR.G0.D0_P -IL1.DDR.G0.D0_N
differential pair IL0.SDR.G13.D5: +IL0.SDR.G13.D5_P -IL0.SDR.G13.D5_N
differential pair IL0.SDR.G13.D4: +IL0.SDR.G13.D4_P -IL0.SDR.G13.D4_N
differential pair IL0.SDR.G13.D3: +IL0.SDR.G13.D3_P -IL0.SDR.G13.D3_N
differential pair IL0.SDR.G13.D2: +IL0.SDR.G13.D2_P -IL0.SDR.G13.D2_N
differential pair IL0.SDR.G13.D1: +IL0.SDR.G13.D1_P -IL0.SDR.G13.D1_N
differential pair IL0.SDR.G13.D0: +IL0.SDR.G13.D0_P -IL0.SDR.G13.D0_N
differential pair IL0.SDR.G13.C: +IL0.SDR.G13.C_P -IL0.SDR.G13.C_N
differential pair IL0.SDR.G8.D3: +IL0.SDR.G8.D3_P -IL0.SDR.G8.D3_N
differential pair IL0.SDR.G8.D2: +IL0.SDR.G8.D2_P -IL0.SDR.G8.D2_N
differential pair IL0.SDR.G8.D1: +IL0.SDR.G8.D1_P -IL0.SDR.G8.D1_N
differential pair IL0.SDR.G8.D0: +IL0.SDR.G8.D0_P -IL0.SDR.G8.D0_N
differential pair IL0.DDR.G3.S: +IL0.DDR.G3.S_P -IL0.DDR.G3.S_N
differential pair IL0.DDR.G3.D4: +IL0.DDR.G3.D4_P -IL0.DDR.G3.D4_N
differential pair IL0.DDR.G3.D3: +IL0.DDR.G3.D3_P -IL0.DDR.G3.D3_N
differential pair IL0.DDR.G3.D2: +IL0.DDR.G3.D2_P -IL0.DDR.G3.D2_N
differential pair IL0.DDR.G3.D1: +IL0.DDR.G3.D1_P -IL0.DDR.G3.D1_N
differential pair IL0.DDR.G3.D0: +IL0.DDR.G3.D0_P -IL0.DDR.G3.D0_N
differential pair IL0.DDR.G2.S: +IL0.DDR.G2.S_P -IL0.DDR.G2.S_N
differential pair IL0.DDR.G2.D4: +IL0.DDR.G2.D4_P -IL0.DDR.G2.D4_N
differential pair IL0.DDR.G2.D3: +IL0.DDR.G2.D3_P -IL0.DDR.G2.D3_N
differential pair IL0.DDR.G2.D2: +IL0.DDR.G2.D2_P -IL0.DDR.G2.D2_N
differential pair IL0.DDR.G2.D1: +IL0.DDR.G2.D1_P -IL0.DDR.G2.D1_N
differential pair IL0.DDR.G2.D0: +IL0.DDR.G2.D0_P -IL0.DDR.G2.D0_N
differential pair IL0.DDR.G1.S: +IL0.DDR.G1.S_P -IL0.DDR.G1.S_N
differential pair IL0.DDR.G1.D4: +IL0.DDR.G1.D4_P -IL0.DDR.G1.D4_N
differential pair IL0.DDR.G1.D3: +IL0.DDR.G1.D3_P -IL0.DDR.G1.D3_N
differential pair IL0.DDR.G1.D2: +IL0.DDR.G1.D2_P -IL0.DDR.G1.D2_N
differential pair IL0.DDR.G1.D1: +IL0.DDR.G1.D1_P -IL0.DDR.G1.D1_N
differential pair IL0.DDR.G1.D0: +IL0.DDR.G1.D0_P -IL0.DDR.G1.D0_N
differential pair IL0.DDR.G0.S: +IL0.DDR.G0.S_P -IL0.DDR.G0.S_N
differential pair IL0.DDR.G0.D4: +IL0.DDR.G0.D4_P -IL0.DDR.G0.D4_N
differential pair IL0.DDR.G0.D3: +IL0.DDR.G0.D3_P -IL0.DDR.G0.D3_N
differential pair IL0.DDR.G0.D2: +IL0.DDR.G0.D2_P -IL0.DDR.G0.D2_N
differential pair IL0.DDR.G0.D1: +IL0.DDR.G0.D1_P -IL0.DDR.G0.D1_N
differential pair IL0.DDR.G0.D0: +IL0.DDR.G0.D0_P -IL0.DDR.G0.D0_N
differential pair MCLK.C: +MCLK.C_P -MCLK.C_N

## Components (designator, comment, footprint, x,y, rotation, side; value= is the part's Value field where it differs from the comment)
J3 "SEAM-40-11.0-S-10-2-A-K-TR" SEAM-40-11.0-S-10-2-A-K-TR 5511.81,7086.61 r0 top locked
J4 "SEAM-40-11.0-S-10-2-A-K-TR" SEAM-40-11.0-S-10-2-A-K-TR 2362.2,7086.61 r180 top locked
J5 "350180-2" POWER_PAD 7283.46,7165.35 r0 bottom locked
J7 "350180-0" POWER_PAD 7283.46,6496.06 r180 top locked
M1 "MOUNT" MOUNTM3#1 6889.76,6200.79 r180 top locked
M2 "MOUNT" MOUNTM3#1 7677.17,6200.79 r180 top locked
M9 "MOUNT" MOUNTM3#1 6397.64,6496.06 r180 top locked
M10 "MOUNT" MOUNTM3#1 6397.64,7677.17 r180 top locked
M11 "MOUNT" MOUNTM3#1 5413.39,7677.17 r180 top locked
M12 "MOUNT" MOUNTM3#1 4429.13,7677.17 r180 top locked
M13 "MOUNT" MOUNTM3#1 3444.88,7677.17 r180 top locked
M14 "MOUNT" MOUNTM3#1 2460.63,7677.17 r180 top locked
M15 "MOUNT" MOUNTM3#1 1476.38,7677.17 r180 top locked
M16 "MOUNT" MOUNTM3#1 590.55,7677.17 r180 top locked
M17 "MOUNT" MOUNTM3#1 1476.38,6496.06 r270 top locked
M18 "MOUNT" MOUNTM3#1 590.55,6889.76 r270 top locked
M33 "MOUNT" MOUNTM3#1 5413.39,6496.06 r0 top locked
M34 "MOUNT" MOUNTM3#2 4429.13,6496.06 r0 top locked
M35 "MOUNT" MOUNTM3#1 3444.88,6496.06 r0 top locked
M36 "MOUNT" MOUNTM3#1 2460.63,6496.06 r0 top locked
M37 "MOUNT" MOUNTM3#1 6889.76,7125.98 r0 top locked
M38 "MOUNT" MOUNTM3#1 3937.01,7086.61 r0 top locked

## Footprints (in the part's own frame and the unit in brackets; to place one, negate y for a bottom-side part, rotate by r counter-clockwise, add the part's x,y. Pads: shape width x height; smd on the part's side, far side on the other; paste and mask are expansions set on the pad)
MOUNTM3#1 [mm] "M3 Standard Fit Hole"
  round 6 / inner round 4.3 / far side round 6 hole 3.3 paste+0: 1(0,0)
MOUNTM3#2 [mm] "M3 Standard Fit Hole"
  round 6 / inner round 4.191 / far side round 6 hole 3.3 paste+0: 1(0,0)
POWER_PAD [mil] "16AWG Wire Lead Hole"
  round 150 hole 65: 1(0,0)
SEAM-40-11.0-S-10-2-A-K-TR [mil] "Terminal Array Assembly, Surface Mount, 0.050\" Pitch, 400 Pins"
  round 25 smd paste+5 mask+2: 1(975,225) 2(975,175) 3(975,125) 4(975,75) 5(975,25) 6(975,-25) 7(975,-75) 8(975,-125) 9(975,-175) 10(975,-225) 11(925,225) 12(925,175) 13(925,125) 14(925,75) 15(925,25) 16(925,-25) 17(925,-75) 18(925,-125) 19(925,-175) 20(925,-225) 21(875,225) 22(875,175) 23(875,125) 24(875,75) 25(875,25) 26(875,-25) 27(875,-75) 28(875,-125) 29(875,-175) 30(875,-225) 31(825,225) 32(825,175) 33(825,125) 34(825,75) 35(825,25) 36(825,-25) 37(825,-75) 38(825,-125) 39(825,-175) 40(825,-225) 41(775,225) 42(775,175) 43(775,125) 44(775,75) 45(775,25) 46(775,-25) 47(775,-75) 48(775,-125) 49(775,-175) 50(775,-225) 51(725,225) 52(725,175) 53(725,125) 54(725,75) 55(725,25) 56(725,-25) 57(725,-75) 58(725,-125) 59(725,-175) 60(725,-225) 61(675,225) 62(675,175) 63(675,125) 64(675,75) 65(675,25) 66(675,-25) 67(675,-75) 68(675,-125) 69(675,-175) 70(675,-225) 71(625,225) 72(625,175) 73(625,125) 74(625,75) 75(625,25) 76(625,-25) 77(625,-75) 78(625,-125) 79(625,-175) 80(625,-225) 81(575,225) 82(575,175) 83(575,125) 84(575,75) 85(575,25) 86(575,-25) 87(575,-75) 88(575,-125) 89(575,-175) 90(575,-225) 91(525,225) 92(525,175) 93(525,125) 94(525,75) 95(525,25) 96(525,-25) 97(525,-75) 98(525,-125) 99(525,-175) 100(525,-225) 101(475,225) 102(475,175) 103(475,125) 104(475,75) 105(475,25) 106(475,-25) 107(475,-75) 108(475,-125) 109(475,-175) 110(475,-225) 111(425,225) 112(425,175) 113(425,125) 114(425,75) 115(425,25) 116(425,-25) 117(425,-75) 118(425,-125) 119(425,-175) 120(425,-225) 121(375,225) 122(375,175) 123(375,125) 124(375,75) 125(375,25) 126(375,-25) 127(375,-75) 128(375,-125) 129(375,-175) 130(375,-225) 131(325,225) 132(325,175) 133(325,125) 134(325,75) 135(325,25) 136(325,-25) 137(325,-75) 138(325,-125) 139(325,-175) 140(325,-225) 141(275,225) 142(275,175) 143(275,125) 144(275,75) 145(275,25) 146(275,-25) 147(275,-75) 148(275,-125) 149(275,-175) 150(275,-225) 151(225,225) 152(225,175) 153(225,125) 154(225,75) 155(225,25) 156(225,-25) 157(225,-75) 158(225,-125) 159(225,-175) 160(225,-225) 161(175,225) 162(175,175) 163(175,125) 164(175,75) 165(175,25) 166(175,-25) 167(175,-75) 168(175,-125) 169(175,-175) 170(175,-225) 171(125,225) 172(125,175) 173(125,125) 174(125,75) 175(125,25) 176(125,-25) 177(125,-75) 178(125,-125) 179(125,-175) 180(125,-225) 181(75,225) 182(75,175) 183(75,125) 184(75,75) 185(75,25) 186(75,-25) 187(75,-75) 188(75,-125) 189(75,-175) 190(75,-225) 191(25,225) 192(25,175) 193(25,125) 194(25,75) 195(25,25) 196(25,-25) 197(25,-75) 198(25,-125) 199(25,-175) 200(25,-225) 201(-25,225) 202(-25,175) 203(-25,125) 204(-25,75) 205(-25,25) 206(-25,-25) 207(-25,-75) 208(-25,-125) 209(-25,-175) 210(-25,-225) 211(-75,225) 212(-75,175) 213(-75,125) 214(-75,75) 215(-75,25) 216(-75,-25) 217(-75,-75) 218(-75,-125) 219(-75,-175) 220(-75,-225) 221(-125,225) 222(-125,175) 223(-125,125) 224(-125,75) 225(-125,25) 226(-125,-25) 227(-125,-75) 228(-125,-125) 229(-125,-175) 230(-125,-225) 231(-175,225) 232(-175,175) 233(-175,125) 234(-175,75) 235(-175,25) 236(-175,-25) 237(-175,-75) 238(-175,-125) 239(-175,-175) 240(-175,-225) 241(-225,225) 242(-225,175) 243(-225,125) 244(-225,75) 245(-225,25) 246(-225,-25) 247(-225,-75) 248(-225,-125) 249(-225,-175) 250(-225,-225) 251(-275,225) 252(-275,175) 253(-275,125) 254(-275,75) 255(-275,25) 256(-275,-25) 257(-275,-75) 258(-275,-125) 259(-275,-175) 260(-275,-225) 261(-325,225) 262(-325,175) 263(-325,125) 264(-325,75) 265(-325,25) 266(-325,-25) 267(-325,-75) 268(-325,-125) 269(-325,-175) 270(-325,-225) 271(-375,225) 272(-375,175) 273(-375,125) 274(-375,75) 275(-375,25) 276(-375,-25) 277(-375,-75) 278(-375,-125) 279(-375,-175) 280(-375,-225) 281(-425,225) 282(-425,175) 283(-425,125) 284(-425,75) 285(-425,25) 286(-425,-25) 287(-425,-75) 288(-425,-125) 289(-425,-175) 290(-425,-225) 291(-475,225) 292(-475,175) 293(-475,125) 294(-475,75) 295(-475,25) 296(-475,-25) 297(-475,-75) 298(-475,-125) 299(-475,-175) 300(-475,-225) 301(-525,225) 302(-525,175) 303(-525,125) 304(-525,75) 305(-525,25) 306(-525,-25) 307(-525,-75) 308(-525,-125) 309(-525,-175) 310(-525,-225) 311(-575,225) 312(-575,175) 313(-575,125) 314(-575,75) 315(-575,25) 316(-575,-25) 317(-575,-75) 318(-575,-125) 319(-575,-175) 320(-575,-225) 321(-625,225) 322(-625,175) 323(-625,125) 324(-625,75) 325(-625,25) 326(-625,-25) 327(-625,-75) 328(-625,-125) 329(-625,-175) 330(-625,-225) 331(-675,225) 332(-675,175) 333(-675,125) 334(-675,75) 335(-675,25) 336(-675,-25) 337(-675,-75) 338(-675,-125) 339(-675,-175) 340(-675,-225) 341(-725,225) 342(-725,175) 343(-725,125) 344(-725,75) 345(-725,25) 346(-725,-25) 347(-725,-75) 348(-725,-125) 349(-725,-175) 350(-725,-225) 351(-775,225) 352(-775,175) 353(-775,125) 354(-775,75) 355(-775,25) 356(-775,-25) 357(-775,-75) 358(-775,-125) 359(-775,-175) 360(-775,-225) 361(-825,225) 362(-825,175) 363(-825,125) 364(-825,75) 365(-825,25) 366(-825,-25) 367(-825,-75) 368(-825,-125) 369(-825,-175) 370(-825,-225) 371(-875,225) 372(-875,175) 373(-875,125) 374(-875,75) 375(-875,25) 376(-875,-25) 377(-875,-75) 378(-875,-125) 379(-875,-175) 380(-875,-225) 381(-925,225) 382(-925,175) 383(-925,125) 384(-925,75) 385(-925,25) 386(-925,-25) 387(-925,-75) 388(-925,-125) 389(-925,-175) 390(-925,-225) 391(-975,225) 392(-975,175) 393(-975,125) 394(-975,75) 395(-975,25) 396(-975,-25) 397(-975,-75) 398(-975,-125) 399(-975,-175) 400(-975,-225)
  round 0 hole 50 unplated: 401(1070.5,0) 402(-1070.5,-120)
  silkscreen extent -1118,-334 1153,334

## Part data
J3 J4: "Terminal Array Assembly, Surface Mount, 0.050\" Pitch, 400 Pins"
J5: library part Socket, "Test Probe Assembly; Red"
J7: library part Socket, "Test Probe Assembly; Black"
M1 M2 M9 M10 M11 M12 M13 M14 M15 M16 M17 M18 M33 M34 M35 M36 M37 M38: "M3 Standard Fit Hole"

## Via types
v1: diameter 19, hole 10, TOP to BOT, tented both sides, 732 vias

## Nets (pads, with @x,y where several pads share a name; then routed paths per layer and width w, separated by ;. In a path a pad name is that pad's centre, name@x,y a point inside that pad or via, vN(x,y) a via of type N, cw(c..) or ccw(c..) an arc to the next point about the centre after c; other vN are vias at no path point)
GND: J3.1 J3.4 J3.7 J3.10 J3.11 J3.14 J3.17 J3.20 J3.21 J3.24 J3.27 J3.30 J3.31 J3.34 J3.37 J3.40 J3.41 J3.44 J3.47 J3.50 J3.51 J3.54 J3.57 J3.60 J3.61 J3.64 J3.67 J3.70 J3.71 J3.74 J3.77 J3.80 J3.81 J3.84 J3.87 J3.90 J3.91 J3.94 J3.97 J3.100 J3.101 J3.104 J3.107 J3.110 J3.111 J3.114 J3.117 J3.120 J3.121 J3.124 J3.127 J3.130 J3.131 J3.134 J3.137 J3.140 J3.141 J3.144 J3.147 J3.150 J3.151 J3.154 J3.157 J3.160 J3.161 J3.164 J3.167 J3.170 J3.171 J3.174 J3.177 J3.180 J3.181 J3.184 J3.187 J3.190 J3.191 J3.194 J3.197 J3.200 J3.201 J3.204 J3.207 J3.210 J3.211 J3.214 J3.217 J3.220 J3.221 J3.224 J3.227 J3.230 J3.231 J3.234 J3.237 J3.240 J3.241 J3.244 J3.247 J3.250 J3.251 J3.254 J3.257 J3.260 J3.261 J3.264 J3.267 J3.270 J3.271 J3.274 J3.277 J3.280 J3.281 J3.284 J3.287 J3.290 J3.291 J3.294 J3.297 J3.300 J3.301 J3.304 J3.307 J3.310 J3.311 J3.314 J3.317 J3.320 J3.321 J3.324 J3.327 J3.330 J3.331 J3.334 J3.337 J3.340 J3.341 J3.344 J3.347 J3.350 J3.351 J3.354 J3.357 J3.360 J3.361 J3.364 J3.367 J3.370 J3.371 J3.374 J3.377 J3.380 J3.381 J3.384 J3.387 J3.390 J3.391 J3.394 J3.397 J3.400 J4.1 J4.4 J4.7 J4.10 J4.11 J4.14 J4.17 J4.20 J4.21 J4.24 J4.27 J4.30 J4.31 J4.34 J4.37 J4.40 J4.41 J4.44 J4.47 J4.50 J4.51 J4.54 J4.57 J4.60 J4.61 J4.64 J4.67 J4.70 J4.71 J4.74 J4.77 J4.80 J4.81 J4.84 J4.87 J4.90 J4.91 J4.94 J4.97 J4.100 J4.101 J4.104 J4.107 J4.110 J4.111 J4.114 J4.117 J4.120 J4.121 J4.124 J4.127 J4.130 J4.131 J4.134 J4.137 J4.140 J4.141 J4.144 J4.147 J4.150 J4.151 J4.154 J4.157 J4.160 J4.161 J4.164 J4.167 J4.170 J4.171 J4.174 J4.177 J4.180 J4.181 J4.184 J4.187 J4.190 J4.191 J4.194 J4.197 J4.200 J4.201 J4.204 J4.207 J4.210 J4.211 J4.214 J4.217 J4.220 J4.221 J4.224 J4.227 J4.230 J4.231 J4.234 J4.237 J4.240 J4.241 J4.244 J4.247 J4.250 J4.251 J4.254 J4.257 J4.260 J4.261 J4.264 J4.267 J4.270 J4.271 J4.274 J4.277 J4.280 J4.281 J4.284 J4.287 J4.290 J4.291 J4.294 J4.297 J4.300 J4.301 J4.304 J4.307 J4.310 J4.311 J4.314 J4.317 J4.320 J4.321 J4.324 J4.327 J4.330 J4.331 J4.334 J4.337 J4.340 J4.341 J4.344 J4.347 J4.350 J4.351 J4.354 J4.357 J4.360 J4.361 J4.364 J4.367 J4.370 J4.371 J4.374 J4.377 J4.380 J4.381 J4.384 J4.387 J4.390 J4.391 J4.394 J4.397 J4.400 J7.1 M1.1 M2.1 M9.1 M10.1 M11.1 M12.1 M13.1 M14.1 M15.1 M16.1 M17.1 M18.1 M33.1 M34.1 M35.1 M36.1 M37.1 M38.1 | length 10944.2
  TOP w10: v1(1302,7345) 1353.82,7345 J4.10@1387.2,7311.61 ; v1(1355,7010) 1385.59,7010 J4.4@1387.2,7011.61 ; v1(1365,6839.41) J4.1@1387.2,6861.61 ; v1(1373.7,7186.61) 1373.7,7175.11 J4.7@1387.2,7161.61 ; v1(1410.43,7135.83) 1411.42,7135.83 J4.17@1437.2,7161.61 ; v1(1415,6839.41) J4.11@1437.2,6861.61 ; v1(1415,7335) 1415,7333.82 J4.20@1437.2,7311.61 ; J4.14@1437.2,7011.61 v1(1455.59,6993.23) ; v1(1459.65,7135.83) 1461.42,7135.83 J4.27@1487.2,7161.61 ; v1(1465,6839.41) J4.21@1487.2,6861.61 ; J4.24@1487.2,7011.61 v1(1505.59,6993.23) ; J4.30@1492.8,7311.61 v1(1515,7333.82) J4.40@1537.2,7311.61 ; v1(1515,6839.41) J4.31@1537.2,6861.61 ; J4.34@1536.82,7012 J4.34@1537.2,7011.61 v1(1555.2,6993.61) ; J4.37@1537.2,7161.61 v1(1555.59,7143.23) ; v1(1565,6839.41) J4.41@1587.2,6861.61 ; v1(1565,7333.82) J4.50@1587.2,7311.61 ; J4.44@1587.2,7011.61 v1(1605.59,6993.23) ; J4.47@1587.2,7161.61 v1(1605.59,7143.23) ; v1(1615,6839.41) J4.51@1637.2,6861.61 ; v1(1615,7333.82) J4.60@1637.2,7311.61 ; J4.54@1637.2,7011.61 v1(1655.59,6993.23) ; J4.57@1637.2,7161.61 v1(1655.59,7143.23) ; v1(1665,6839.41) J4.61@1687.2,6861.61 ; v1(1665,7333.82) J4.70@1687.2,7311.61 ; J4.64@1687.2,7011.61 v1(1705.59,6993.23) 1723.98,7011.61 J4.74@1737.2,7011.61 ; J4.67@1687.2,7161.61 v1(1705.59,7143.23) ; v1(1715,6839.41) J4.71@1737.2,6861.61 ; v1(1715,7333.82) J4.80@1737.2,7311.61 ; J4.77@1737.2,7161.61 v1(1755.59,7143.23) ; v1(1765,6839.41) J4.81@1787.2,6861.61 ; v1(1765,7333.82) J4.90@1787.2,7311.61 ; J4.84@1787.2,7011.61 J4.94@1837.2,7011.61 1854,6994.82 v1(1854,6988) 1863.59,6988 J4.104@1887.2,7011.61 ; J4.87@1787.2,7161.61 v1(1805.59,7143.23) ; v1(1815,6839.41) J4.91@1837.2,6861.61 ; v1(1815,7333.82) J4.100@1837.2,7311.61 ; J4.97@1837.2,7161.61 v1(1855.59,7143.23) ; v1(1865,6839.41) J4.101@1887.2,6861.61 ; v1(1865,7333.82) J4.110@1887.2,7311.61 ; J4.107@1887.2,7161.61 v1(1905.59,7143.23) ; v1(1915,6839.41) J4.111@1937.2,6861.61 ; v1(1915,7333.82) J4.120@1937.2,7311.61 ; J4.114@1937.2,7011.61 J4.124@1987.2,7011.61 J4.134@2037.2,7011.61 2023.7,7025.11 v1(2023.7,7036.61) ; J4.117@1937.2,7161.61 v1(1955.59,7143.23) ; v1(1965,6839.41) J4.121@1987.2,6861.61 ; v1(1965,7333.82) J4.130@1987.2,7311.61 ; v1(1973.7,7186.61) 1973.7,7175.11 J4.127@1987.2,7161.61 ; v1(2015,6839.41) J4.131@2037.2,6861.61 ; v1(2015,7333.82) J4.140@2037.2,7311.61 ; v1(2023.7,7186.61) 2023.7,7175.11 J4.137@2037.2,7161.61 ; v1(2065,6839.41) J4.141@2087.2,6861.61 ; v1(2065,7333.82) J4.150@2087.2,7311.61 ; v1(2073.7,7036.61) 2073.7,7025.11 J4.144@2087.2,7011.61 ; v1(2073.7,7186.61) 2073.7,7175.11 J4.147@2087.2,7161.61 ; v1(2115,6839.41) J4.151@2137.2,6861.61 ; v1(2115,7333.82) J4.160@2137.2,7311.61 ; v1(2123.7,7036.61) 2123.7,7025.11 J4.154@2137.2,7011.61 ; v1(2123.7,7186.61) 2123.7,7175.11 J4.157@2137.2,7161.61 ; v1(2165,6839.41) J4.161@2187.2,6861.61 ; v1(2165,7333.82) J4.170@2187.2,7311.61 ; v1(2173.7,7036.61) 2173.7,7025.11 J4.164@2187.2,7011.61 ; v1(2173.7,7186.61) 2173.7,7175.11 J4.167@2187.2,7161.61 ; v1(2215,6839.41) J4.171@2237.2,6861.61 ; v1(2215,7333.82) J4.180@2237.2,7311.61 ; v1(2223.7,7036.61) 2223.7,7025.11 J4.174@2237.2,7011.61 ; v1(2223.7,7186.61) 2223.7,7175.11 J4.177@2237.2,7161.61 ; v1(2265,6839.41) J4.181@2287.2,6861.61 ; v1(2265,7333.82) J4.190@2287.2,7311.61 ; v1(2273.7,7036.61) 2273.7,7025.11 J4.184@2287.2,7011.61 ; v1(2273.7,7186.61) 2273.7,7175.11 J4.187@2287.2,7161.61 ; v1(2315,6839.41) J4.191@2337.2,6861.61 ; v1(2315,7333.82) J4.200@2337.2,7311.61 ; v1(2323.7,7036.61) 2323.7,7025.11 J4.194@2337.2,7011.61 ; v1(2323.7,7186.61) 2323.7,7175.11 J4.197@2337.2,7161.61 ; v1(2365,6839.41) J4.201@2387.2,6861.61 ; v1(2365,7333.82) J4.210@2387.2,7311.61 ; v1(2373.7,7036.61) 2373.7,7025.11 J4.204@2387.2,7011.61 ; J4.207@2387.2,7161.61 v1(2405.59,7143.23) ; v1(2415,6839.41) J4.211@2437.2,6861.61 ; v1(2415,7333.82) J4.220@2437.2,7311.61 ; v1(2423.7,7036.61) 2423.7,7025.11 J4.214@2437.2,7011.61 ; J4.217@2437.2,7161.61 v1(2455.59,7143.23) ; v1(2465,6839.41) J4.221@2487.2,6861.61 ; v1(2465,7333.82) J4.230@2487.2,7311.61 ; v1(2473.7,7036.61) 2473.7,7025.11 J4.224@2487.2,7011.61 ; J4.227@2487.2,7161.61 v1(2505.59,7143.23) ; v1(2515,6839.41) J4.231@2537.2,6861.61 ; v1(2515,7333.82) J4.240@2537.2,7311.61 ; v1(2523.7,7036.61) 2523.7,7025.11 J4.234@2537.2,7011.61 ; J4.237@2537.2,7161.61 v1(2555.59,7143.23) ; v1(2565,6839.41) J4.241@2587.2,6861.61 J4.251@2637.2,6861.61 ; v1(2565,7333.82) J4.250@2587.2,7311.61 J4.260@2637.2,7311.61 ; v1(2573.7,7036.61) 2573.7,7025.11 J4.244@2587.2,7011.61 ; J4.247@2587.2,7161.61 v1(2605.59,7143.23) ; v1(2623.7,7036.61) 2623.7,7025.11 J4.254@2637.2,7011.61 ; J4.257@2637.2,7161.61 v1(2655.59,7143.23) ; v1(2673.7,7036.61) 2673.7,7025.11 J4.264@2687.2,7011.61 ; J4.261@2687.2,6861.61 2709.41,6839.41 v1(2715,6839.41) J4.271@2737.2,6861.61 ; J4.267@2687.2,7161.61 v1(2705.59,7143.23) ; J4.270@2687.2,7311.61 v1@2712,7336.41 ; v1@2712,7335 v1@2712,7336.41 ; v1(2712,7341) v1@2712,7336.41 ; v1(2723.7,7036.61) 2723.7,7025.11 J4.274@2737.2,7011.61 ; J4.277@2737.2,7161.61 v1(2755.59,7143.23) ; J4.280@2737.2,7311.61 2712.2,7336.61 v1@2712,7336.41 ; v1(2765,6839.41) J4.281@2787.2,6861.61 ; v1(2773.7,7036.61) 2773.7,7025.11 J4.284@2787.2,7011.61 ; J4.287@2787.2,7161.61 v1(2805.59,7143.23) 2823.98,7161.61 J4.297@2837.2,7161.61 J4.307@2887.2,7161.61 J4.317@2937.2,7161.61 ; J4.290@2787.2,7311.61 v1@2812,7336.41 ; v1@2812,7335 v1@2812,7336.41 ; v1(2812,7341) v1@2812,7336.41 ; v1(2815,6839.41) J4.291@2837.2,6861.61 ; v1(2823.7,7036.61) 2823.7,7025.11 J4.294@2837.2,7011.61 ; J4.300@2837.2,7311.61 2812.2,7336.61 v1@2812,7336.41 ; v1(2865,6839.41) J4.301@2887.2,6861.61 ; v1(2873.7,7036.61) 2873.7,7025.11 J4.304@2887.2,7011.61 ; J4.310@2887.2,7311.61 v1@2912,7336.41 ; v1@2912,7335 v1@2912,7336.41 ; v1(2912,7341) v1@2912,7336.41 ; v1(2915,6839.41) J4.311@2937.2,6861.61 ; v1(2923.7,7036.61) 2923.7,7025.11 J4.314@2937.2,7011.61 ; J4.320@2937.2,7311.61 2912.2,7336.61 v1@2912,7336.41 ; v1(2965,6839.41) J4.321@2987.2,6861.61 ; v1(2973.7,7036.61) 2973.7,7025.11 J4.324@2987.2,7011.61 ; v1(2973.7,7186.61) 2973.7,7175.11 J4.327@2987.2,7161.61 ; J4.330@2987.2,7311.61 v1@3012,7336.41 ; v1@3012,7335 v1@3012,7336.41 ; v1(3012,7341) v1@3012,7336.41 ; v1(3015,6839.41) J4.331@3037.2,6861.61 ; v1(3023.7,7036.61) 3023.7,7025.11 J4.334@3037.2,7011.61 ; v1(3023.7,7186.61) 3023.7,7175.11 J4.337@3037.2,7161.61 ; J4.340@3037.2,7311.61 3012.2,7336.61 v1@3012,7336.41 ; v1(3065,6839.41) J4.341@3087.2,6861.61 ; v1(3073.7,7036.61) 3073.7,7025.11 J4.344@3087.2,7011.61 ; v1(3073.7,7186.61) 3073.7,7175.11 J4.347@3087.2,7161.61 ; J4.350@3087.2,7311.61 v1@3112,7336.41 ; v1@3112,7335 v1@3112,7336.41 ; v1(3112,7341) v1@3112,7336.41 ; v1(3115,6839.41) J4.351@3137.2,6861.61 ; v1(3123.7,7036.61) 3123.7,7025.11 J4.354@3137.2,7011.61 ; v1(3123.7,7186.61) 3123.7,7175.11 J4.357@3137.2,7161.61 ; J4.360@3137.2,7311.61 3112.2,7336.61 v1@3112,7336.41 ; v1(3165,6839.41) J4.361@3187.2,6861.61 ; v1(3173.7,7036.61) 3173.7,7025.11 J4.364@3187.2,7011.61 ; v1(3173.7,7186.61) 3173.7,7175.11 J4.367@3187.2,7161.61 ; J4.370@3187.2,7311.61 v1@3212,7336.41 ; v1@3212,7335 v1@3212,7336.41 ; v1(3212,7341) v1@3212,7336.41 ; v1(3215,6839.41) J4.371@3237.2,6861.61 ; v1(3223.7,7036.61) 3223.7,7025.11 J4.374@3237.2,7011.61 ; v1(3223.7,7186.61) 3223.7,7175.11 J4.377@3237.2,7161.61 ; J4.380@3237.2,7311.61 3212.2,7336.61 v1@3212,7336.41 ; v1(3265,6839.41) J4.381@3287.2,6861.61 ; v1(3273.7,7036.61) 3273.7,7025.11 J4.384@3287.2,7011.61 ; v1(3273.7,7186.61) 3273.7,7175.11 J4.387@3287.2,7161.61 J4.397@3337.2,7161.61 ; J4.390@3287.2,7311.61 v1@3312,7336.41 ; v1@3312,7335 v1@3312,7336.41 ; v1(3312,7341) v1@3312,7336.41 ; v1(3315,6839.41) J4.391@3337.2,6861.61 ; v1(3323.7,7036.61) 3323.7,7025.11 J4.394@3337.2,7011.61 ; J4.400@3337.2,7311.61 3312.2,7336.61 v1@3312,7336.41 ; v1(4480,6985) 4491.11,6985 4517.72,7011.62 J3.397@4536.81,7011.61 J3.387@4586.81,7011.61 ; v1(4523.31,7186.61) 4523.31,7175.11 J3.394@4536.81,7161.61 ; J3.400@4536.81,6861.61 4561.71,6836.71 v1@4561.81,6836.61 ; J3.391@4536.81,7311.61 4560.2,7335 v1(4563.43,7335) J3.381@4586.81,7311.61 ; v1@4560.2,6835 v1@4561.81,6836.61 ; v1@4563.42,6835 v1@4561.81,6836.61 ; v1(4573.31,7186.61) 4573.31,7175.11 J3.384@4586.81,7161.61 J3.374@4636.81,7161.61 J3.364@4686.81,7161.61 J3.354@4736.81,7161.61 v1(4755,7143.42) ; J3.390@4586.81,6861.61 v1@4561.81,6836.61 ; v1@4610.2,6835 J3.380@4636.81,6861.61 ; v1(4613.42,7335) J3.371@4636.81,7311.61 ; v1(4623.31,7036.61) 4623.31,7025.11 J3.377@4636.81,7011.61 ; v1@4660.2,6835 J3.370@4686.81,6861.61 ; v1(4663.42,7335) J3.361@4686.81,7311.61 ; v1(4673.31,7036.61) 4673.31,7025.11 J3.367@4686.81,7011.61 ; v1@4710.2,6835 J3.360@4736.81,6861.61 ; v1(4715,7335) 4715,7333.42 J3.351@4736.81,7311.61 ; v1(4723.31,7036.61) 4723.31,7025.11 J3.357@4736.81,7011.61 ; v1(4760,7285) 4760.2,7285 J3.341@4786.81,7311.61 ; v1@4760.2,6835 J3.350@4786.81,6861.61 ; v1(4773.31,7036.61) 4773.31,7025.11 J3.347@4786.81,7011.61 ; J3.344@4786.81,7161.61 v1(4805,7143.42) ; v1(4810,7285) 4810.2,7285 J3.331@4836.81,7311.61 ; v1(4813.62,6838.42) J3.340@4836.81,6861.61 ; v1(4823.31,7036.61) 4823.31,7025.11 J3.337@4836.81,7011.61 ; J3.334@4836.81,7161.61 v1(4855,7143.42) ; v1@4860,7284.8 v1(4862.6,7287.4) J3.321@4886.81,7311.61 ; v1(4863.62,6838.42) J3.330@4886.81,6861.61 ; v1(4873.31,7036.61) 4873.31,7025.11 J3.327@4886.81,7011.61 ; J3.324@4886.81,7161.61 v1(4905,7143.42) ; v1(4910,6984.81) J3.317@4936.81,7011.61 ; v1@4910,7285 4910.2,7285 v1(4912,7286.8) J3.311@4936.81,7311.61 ; J3.320@4936.81,6861.61 4950.31,6848.11 v1@4950.31,6837.11 ; J3.314@4936.81,7161.61 v1(4955,7143.42) ; v1(4950.31,6836.61) v1@4950.31,6837.11 ; v1@4950.81,6836.61 4950.56,6836.86 v1@4950.31,6837.11 ; v1(4961.61,7287.4) 4962.6,7287.4 J3.301@4986.81,7311.61 ; v1(4973.31,6886.61) 4973.31,6875.11 J3.310@4986.81,6861.61 ; J3.307@4986.81,7011.61 J3.297@5036.81,7011.61 v1(5055,6993.42) ; J3.304@4986.81,7161.61 v1(5005,7143.42) ; v1(5011.2,7286) J3.291@5036.81,7311.61 ; J3.300@5036.81,6861.61 v1(5053.42,6845) ; J3.294@5036.81,7161.61 v1(5055,7143.42) ; v1(5073.31,7036.61) 5073.31,7025.11 J3.287@5086.81,7011.61 ; J3.290@5086.81,6861.61 v1(5110,6838.42) ; J3.284@5086.81,7161.61 v1(5105,7143.42) ; J3.281@5086.81,7311.61 5086.81,7351.81 v1(5115,7380) ; v1@5122.81,6886.61 5123.06,6886.36 v1@5123.31,6886.11 ; v1(5123.31,6886.61) v1@5123.31,6886.11 ; v1(5123.31,7036.61) 5123.31,7025.11 J3.277@5136.81,7011.61 ; v1(5123.31,7186.61) 5123.31,7175.11 J3.274@5136.81,7161.61 ; v1(5123.31,7336.61) 5123.31,7325.11 J3.271@5136.81,7311.61 ; J3.280@5136.81,6861.61 5123.31,6875.11 v1@5123.31,6886.11 ; v1(5173.31,6886.61) 5173.31,6875.11 J3.270@5186.81,6861.61 ; v1(5173.31,7036.61) 5173.31,7025.11 J3.267@5186.81,7011.61 ; v1(5173.31,7186.61) 5173.31,7175.11 J3.264@5186.81,7161.61 ; v1(5173.31,7336.61) 5173.31,7325.11 J3.261@5186.81,7311.61 ; v1@5222.81,6886.61 5223.06,6886.36 v1@5223.31,6886.11 ; v1(5223.31,6886.61) v1@5223.31,6886.11 ; v1(5223.31,7036.61) 5223.31,7025.11 J3.257@5236.81,7011.61 ; v1(5223.31,7186.61) 5223.31,7175.11 J3.254@5236.81,7161.61 ; v1(5223.31,7336.61) 5223.31,7325.11 J3.251@5236.81,7311.61 ; J3.260@5236.81,6861.61 5223.31,6875.11 v1@5223.31,6886.11 ; v1(5273.31,6886.61) 5273.31,6875.11 J3.250@5286.81,6861.61 ; v1(5273.31,7036.61) 5273.31,7025.11 J3.247@5286.81,7011.61 ; v1(5273.31,7186.61) 5273.31,7175.11 J3.244@5286.81,7161.61 ; v1(5273.31,7336.61) 5273.31,7325.11 J3.241@5286.81,7311.61 ; v1@5322.81,6886.61 5323.06,6886.36 v1@5323.31,6886.11 ; v1(5323.31,6886.61) v1@5323.31,6886.11 ; v1(5323.31,7036.61) 5323.31,7025.11 J3.237@5336.81,7011.61 ; v1(5323.31,7186.61) 5323.31,7175.11 J3.234@5336.81,7161.61 ; v1(5323.31,7336.61) 5323.31,7325.11 J3.231@5336.81,7311.61 ; J3.240@5336.81,6861.61 5323.31,6875.11 v1@5323.31,6886.11 ; v1(5373.31,6886.61) 5373.31,6875.11 J3.230@5386.81,6861.61 ; v1(5373.31,7036.61) 5373.31,7025.11 J3.227@5386.81,7011.61 ; v1(5373.31,7186.61) 5373.31,7175.11 J3.224@5386.81,7161.61 ; v1(5373.31,7336.61) 5373.31,7325.11 J3.221@5386.81,7311.61 ; v1@5422.81,6886.61 5423.06,6886.36 v1@5423.31,6886.11 ; v1(5423.31,6886.61) v1@5423.31,6886.11 ; v1(5423.31,7036.61) 5423.31,7025.11 J3.217@5436.81,7011.61 ; v1(5423.31,7186.61) 5423.31,7175.11 J3.214@5436.81,7161.61 ; v1(5423.31,7336.61) 5423.31,7325.11 J3.211@5436.81,7311.61 ; J3.220@5436.81,6861.61 5423.31,6875.11 v1@5423.31,6886.11 ; v1(5473.31,6886.61) 5473.31,6875.11 J3.210@5486.81,6861.61 ; v1(5473.31,7036.61) 5473.31,7025.11 J3.207@5486.81,7011.61 ; v1(5473.31,7186.61) 5473.31,7175.11 J3.204@5486.81,7161.61 ; v1(5473.31,7336.61) 5473.31,7325.11 J3.201@5486.81,7311.61 ; v1@5522.81,6886.61 5523.06,6886.36 v1@5523.31,6886.11 ; v1(5523.31,6886.61) v1@5523.31,6886.11 ; v1(5523.31,7036.61) 5523.31,7025.11 J3.197@5536.81,7011.61 ; v1(5523.31,7186.61) 5523.31,7175.11 J3.194@5536.81,7161.61 ; v1(5523.31,7336.61) 5523.31,7325.11 J3.191@5536.81,7311.61 ; J3.200@5536.81,6861.61 5523.31,6875.11 v1@5523.31,6886.11 ; v1(5573.31,6886.61) 5573.31,6875.11 J3.190@5586.81,6861.61 ; v1(5573.31,7036.61) 5573.31,7025.11 J3.187@5586.81,7011.61 ; v1(5573.31,7186.61) 5573.31,7175.11 J3.184@5586.81,7161.61 ; v1(5573.31,7336.61) 5573.31,7325.11 J3.181@5586.81,7311.61 ; v1@5622.81,6886.61 5623.06,6886.36 v1@5623.31,6886.11 ; v1(5623.31,6886.61) v1@5623.31,6886.11 ; v1(5623.31,7036.61) 5623.31,7025.11 J3.177@5636.81,7011.61 ; v1(5623.31,7186.61) 5623.31,7175.11 J3.174@5636.81,7161.61 ; v1(5623.31,7336.61) 5623.31,7325.11 J3.171@5636.81,7311.61 ; J3.180@5636.81,6861.61 5623.31,6875.11 v1@5623.31,6886.11 ; v1(5673.31,6886.61) 5673.31,6875.11 J3.170@5686.81,6861.61 ; v1(5673.31,7036.61) 5673.31,7025.11 J3.167@5686.81,7011.61 ; v1(5673.31,7186.61) 5673.31,7175.11 J3.164@5686.81,7161.61 ; v1(5673.31,7336.61) 5673.31,7325.11 J3.161@5686.81,7311.61 ; v1@5722.81,6886.61 5723.06,6886.36 v1@5723.31,6886.11 ; v1(5723.31,6886.61) v1@5723.31,6886.11 ; v1(5723.31,7036.61) 5723.31,7025.11 J3.157@5736.81,7011.61 ; v1(5723.31,7186.61) 5723.31,7175.11 J3.154@5736.81,7161.61 ; v1(5723.31,7336.61) 5723.31,7325.11 J3.151@5736.81,7311.61 ; J3.160@5736.81,6861.61 5723.31,6875.11 v1@5723.31,6886.11 ; v1(5773.31,6886.61) 5773.31,6875.11 J3.150@5786.81,6861.61 ; v1(5773.31,7036.61) 5773.31,7025.11 J3.147@5786.81,7011.61 ; v1(5773.31,7186.61) 5773.31,7175.11 J3.144@5786.81,7161.61 ; v1(5773.31,7336.61) 5773.31,7325.11 J3.141@5786.81,7311.61 ; v1(5815,7335) 5815,7333.42 J3.131@5836.81,7311.61 ; v1(5818.42,6843.23) J3.140@5836.81,6861.61 ; v1(5823.31,7036.61) 5823.31,7025.11 J3.137@5836.81,7011.61 ; v1(5823.31,7186.61) 5823.31,7175.11 J3.134@5836.81,7161.61 ; v1(5850,7365) 5883.42,7365 J3.111@5936.81,7311.61 ; v1(5865,6883.42) J3.130@5886.81,6861.61 ; v1(5865,7335) 5865,7333.42 J3.121@5886.81,7311.61 ; v1(5873.31,7036.61) 5873.31,7025.11 J3.127@5886.81,7011.61 ; v1(5873.31,7186.61) 5873.31,7175.11 J3.124@5886.81,7161.61 ; v1(5918.42,6843.23) J3.120@5936.81,6861.61 ; v1(5923,7186) 5923,7175.42 J3.114@5936.81,7161.61 ; v1(5923.31,7036.61) 5923.31,7025.11 J3.117@5936.81,7011.61 J3.107@5986.81,7011.61 J3.97@6036.81,7011.61 J3.87@6086.81,7011.61 ; v1(5973.31,7186.61) 5973.31,7175.11 J3.104@5986.81,7161.61 ; J3.110@5986.81,6861.61 6013.42,6835 v1(6015,6835) 6036.81,6856.81 J3.100@6036.81,6861.61 ; J3.101@5986.81,7311.61 5985,7313.42 5985,7336.8 v1(6000,7351.8) ; v1(6023.31,7186.61) 6023.31,7175.11 J3.94@6036.81,7161.61 ; v1(6023.31,7336.61) 6023.31,7325.11 J3.91@6036.81,7311.61 ; v1(6073.31,7186.61) 6073.31,7175.11 J3.84@6086.81,7161.61 ; v1(6085,7345) 6085,7313.43 J3.81@6086.81,7311.61 ; J3.90@6086.81,6861.61 J3.80@6136.81,6861.61 J3.70@6186.81,6861.61 6200,6848.42 v1(6200,6820) ; v1(6110.2,7135) J3.74@6136.81,7161.61 ; v1(6123.31,7336.61) 6123.31,7325.11 J3.71@6136.81,7311.61 ; v1(6150,6990) 6148.42,6991.58 6148.42,7000 J3.77@6136.81,7011.61 J3.67@6186.81,7011.61 J3.57@6236.81,7011.61 J3.47@6286.81,7011.61 ; v1(6173.31,7186.61) 6173.31,7175.11 J3.64@6186.81,7161.61 ; v1(6185,7345) 6185,7313.42 J3.61@6186.81,7311.61 ; v1(6223.31,7186.61) 6223.31,7175.11 J3.54@6236.81,7161.61 ; J3.51@6236.81,7311.61 v1(6259.01,7333.82) 6264.61,7333.82 J3.41@6286.81,7311.61 ; J3.60@6239.61,6864.41 v1@6270,6834.02 ; v1(6270,6825) v1@6270,6834.02 ; v1(6273.31,7186.61) 6273.31,7175.11 J3.44@6286.81,7161.61 ; J3.50@6286.81,6861.61 6265,6839.8 6270,6834.8 v1@6270,6834.02 ; J3.47@6286.81,7011.61 J3.37@6336.81,7011.61 ; v1(6323.31,7186.61) 6323.31,7175.11 J3.34@6336.81,7161.61 ; J3.40@6336.81,6861.61 6359.01,6839.41 v1(6364.61,6839.41) J3.30@6386.81,6861.61 ; J3.31@6336.81,7311.61 v1(6359.01,7333.82) 6364.61,7333.82 J3.21@6386.81,7311.61 ; v1(6373.31,7186.61) 6373.31,7175.11 J3.24@6386.81,7161.61 ; J3.27@6386.43,7012 J3.27@6386.81,7011.61 J3.17@6436.81,7011.61 J3.7@6486.81,7011.61 6483.42,7015 6486.81,7015 v1(6520,7015) ; v1(6414.61,6839.41) J3.20@6436.81,6861.61 ; v1(6423.31,7186.61) 6423.31,7175.11 J3.14@6436.81,7161.61 ; J3.11@6436.81,7311.61 6475.2,7350 v1(6490,7350) ; J3.10@6486.81,6861.61 6490.2,6865 v1(6590,6865) ; J3.4@6486.81,7161.61 v1(6550,7161.61) ; J3.1@6486.81,7311.61 v1(6514.29,7311.61)
  other v1: 4560,6835 4610,6835 4660,6835 4710,6835 4760,6835
IL0.DDR.G0.D0_N: J3.73 J4.43 | length 5793.9
  TOP w4: v1(1562.2,6948.11) 1573.7,6948.11 J4.43@1587.2,6961.61 ; J3.73@6136.81,7211.61 6150.31,7198.11 v1(6150.31,7186.61)
  S6(H) w4: v1(1562.2,6948.11) 1585.59,6924.73 1617.91,6924.73 1629.91,6912.73 1629.91,6872.06 1647,6854.97 1647,6796.03 cw(c1632.97,6796.03) 1635,6782.15 ; 1635,6782 1582,6782 ccw(c1582,6775) 1575,6775 ccw(c1583,6775) 1583,6767 1625,6767 cw(c1625,6745) 1635,6764.6 cw(c1625,6745) 1647,6745 1647,6721.03 cw(c1632.97,6721.03) 1632.97,6707 1582,6707 ccw(c1582,6700) 1575,6700 ccw(c1583,6700) 1583,6692 1625,6692 cw(c1625,6670) 1647,6670 1647,6644.97 1659.97,6632 3772.03,6632 4606.83,7466.8 5938.2,7466.8 6065.03,7339.97 6065.03,7310.06 6049.97,7295 6015,7295 6010,7290 6010,7285 6013,7282 6123,7282 6142,7263 6142,7200.04 v1@6147.12,7194.92